# Altium PCB fpga_board.PcbDoc (part 1 of 4)
Units mil, origin at the board's own origin, x right, y up, seen from the top; angles counter-clockwise.
Board outline 3204.72 x 2960.63 mil, 6 copper layers (Top Layer, GND1, SIG, PWR, GND2, Bottom Layer), stack 32.112 mil thick; 192 components, 182 nets, 714 pads, 321 vias.
Unrouted connection lines stored in the file: 11.
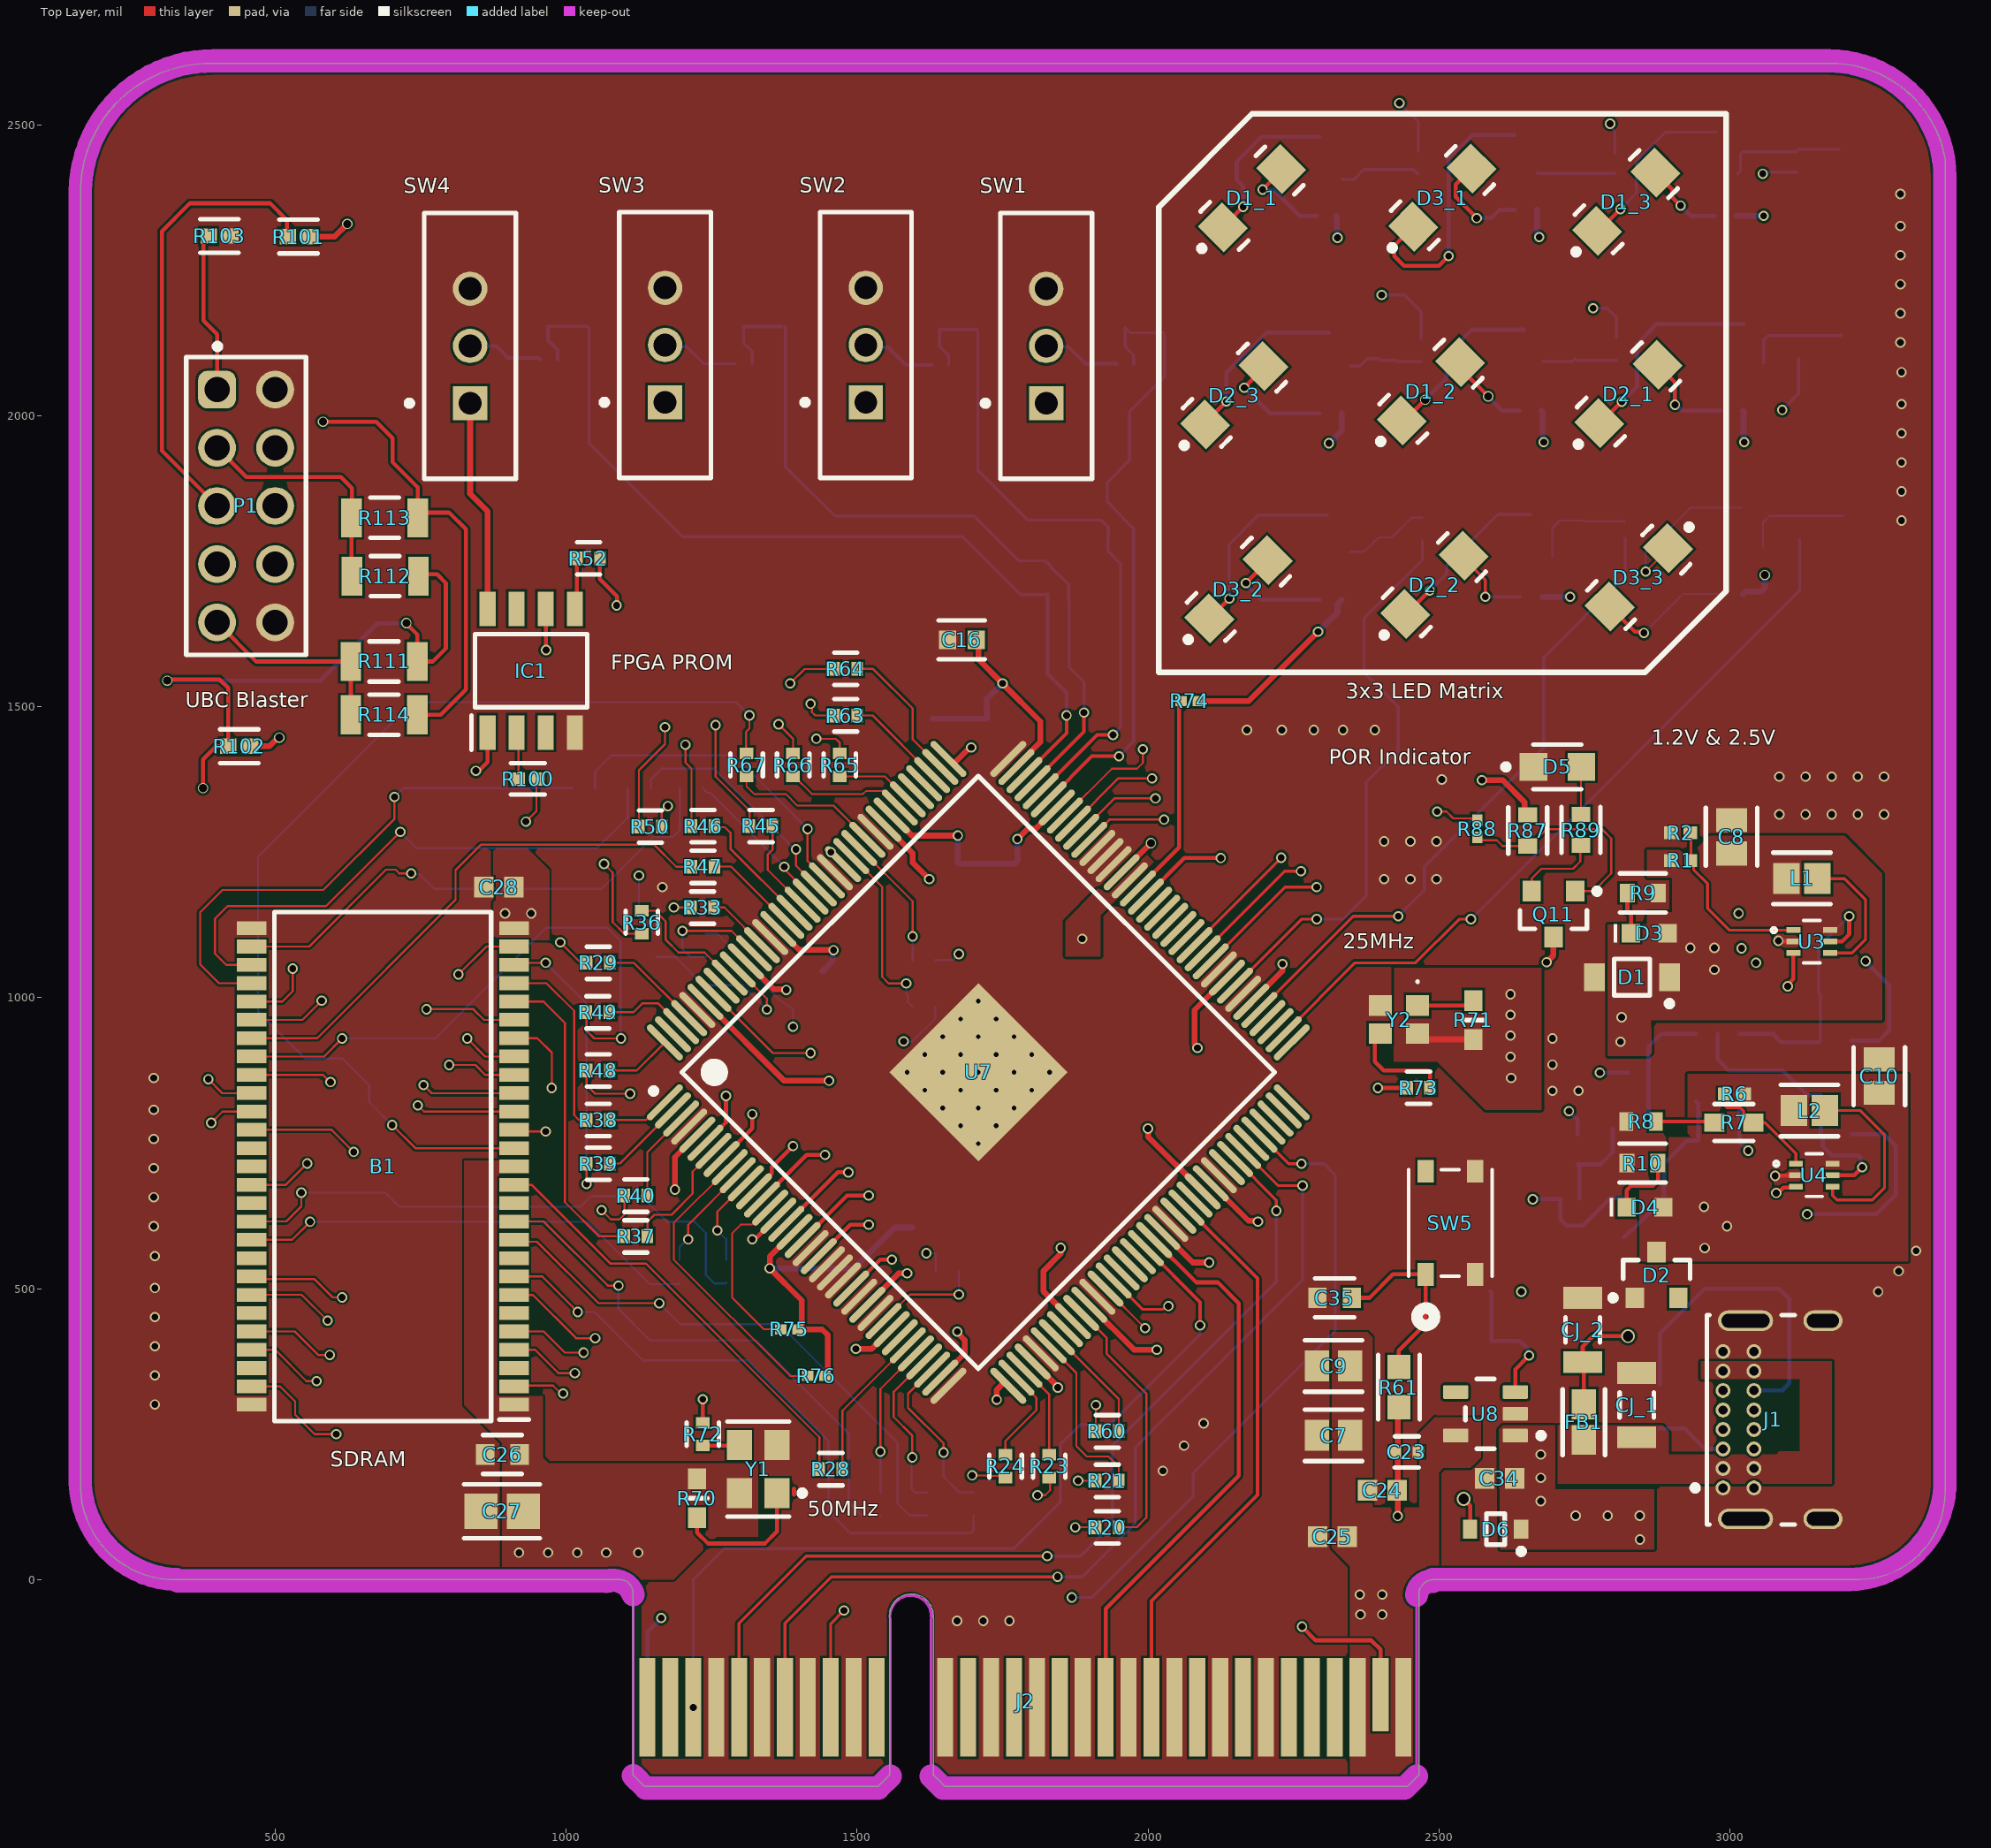
[diagram p0: Top Layer view]
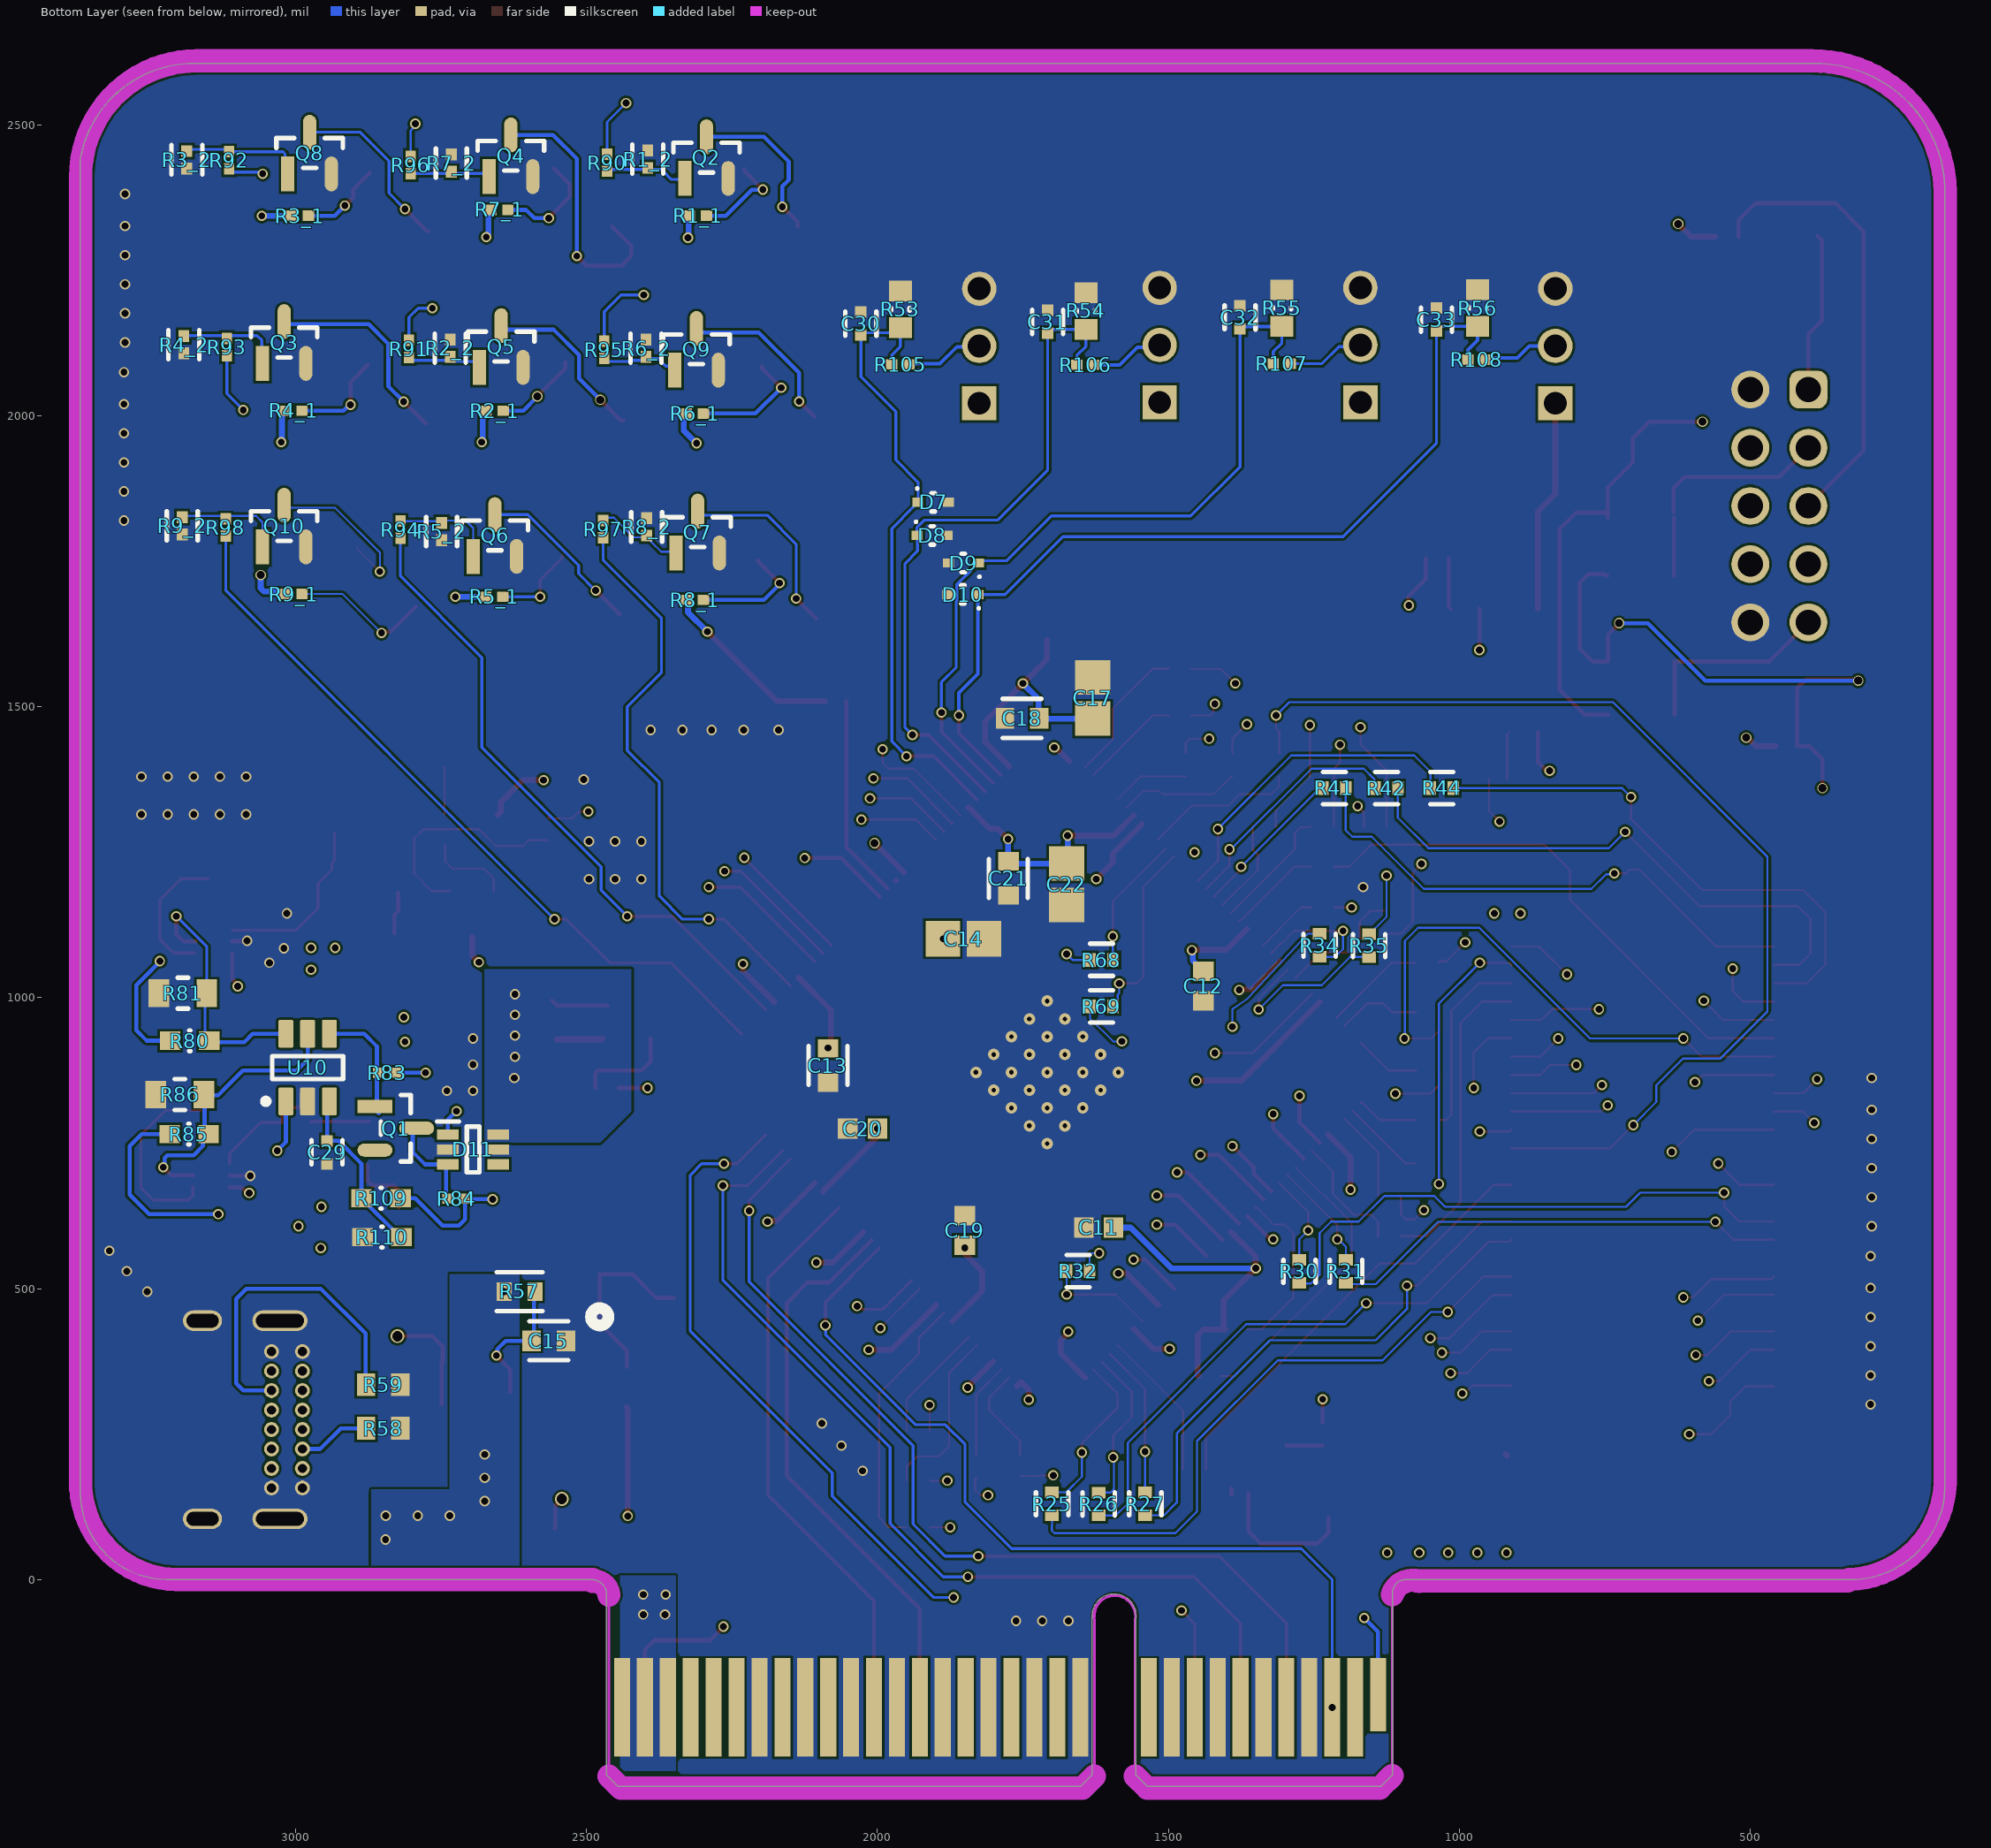
[diagram p1: Bottom Layer view, seen from below]
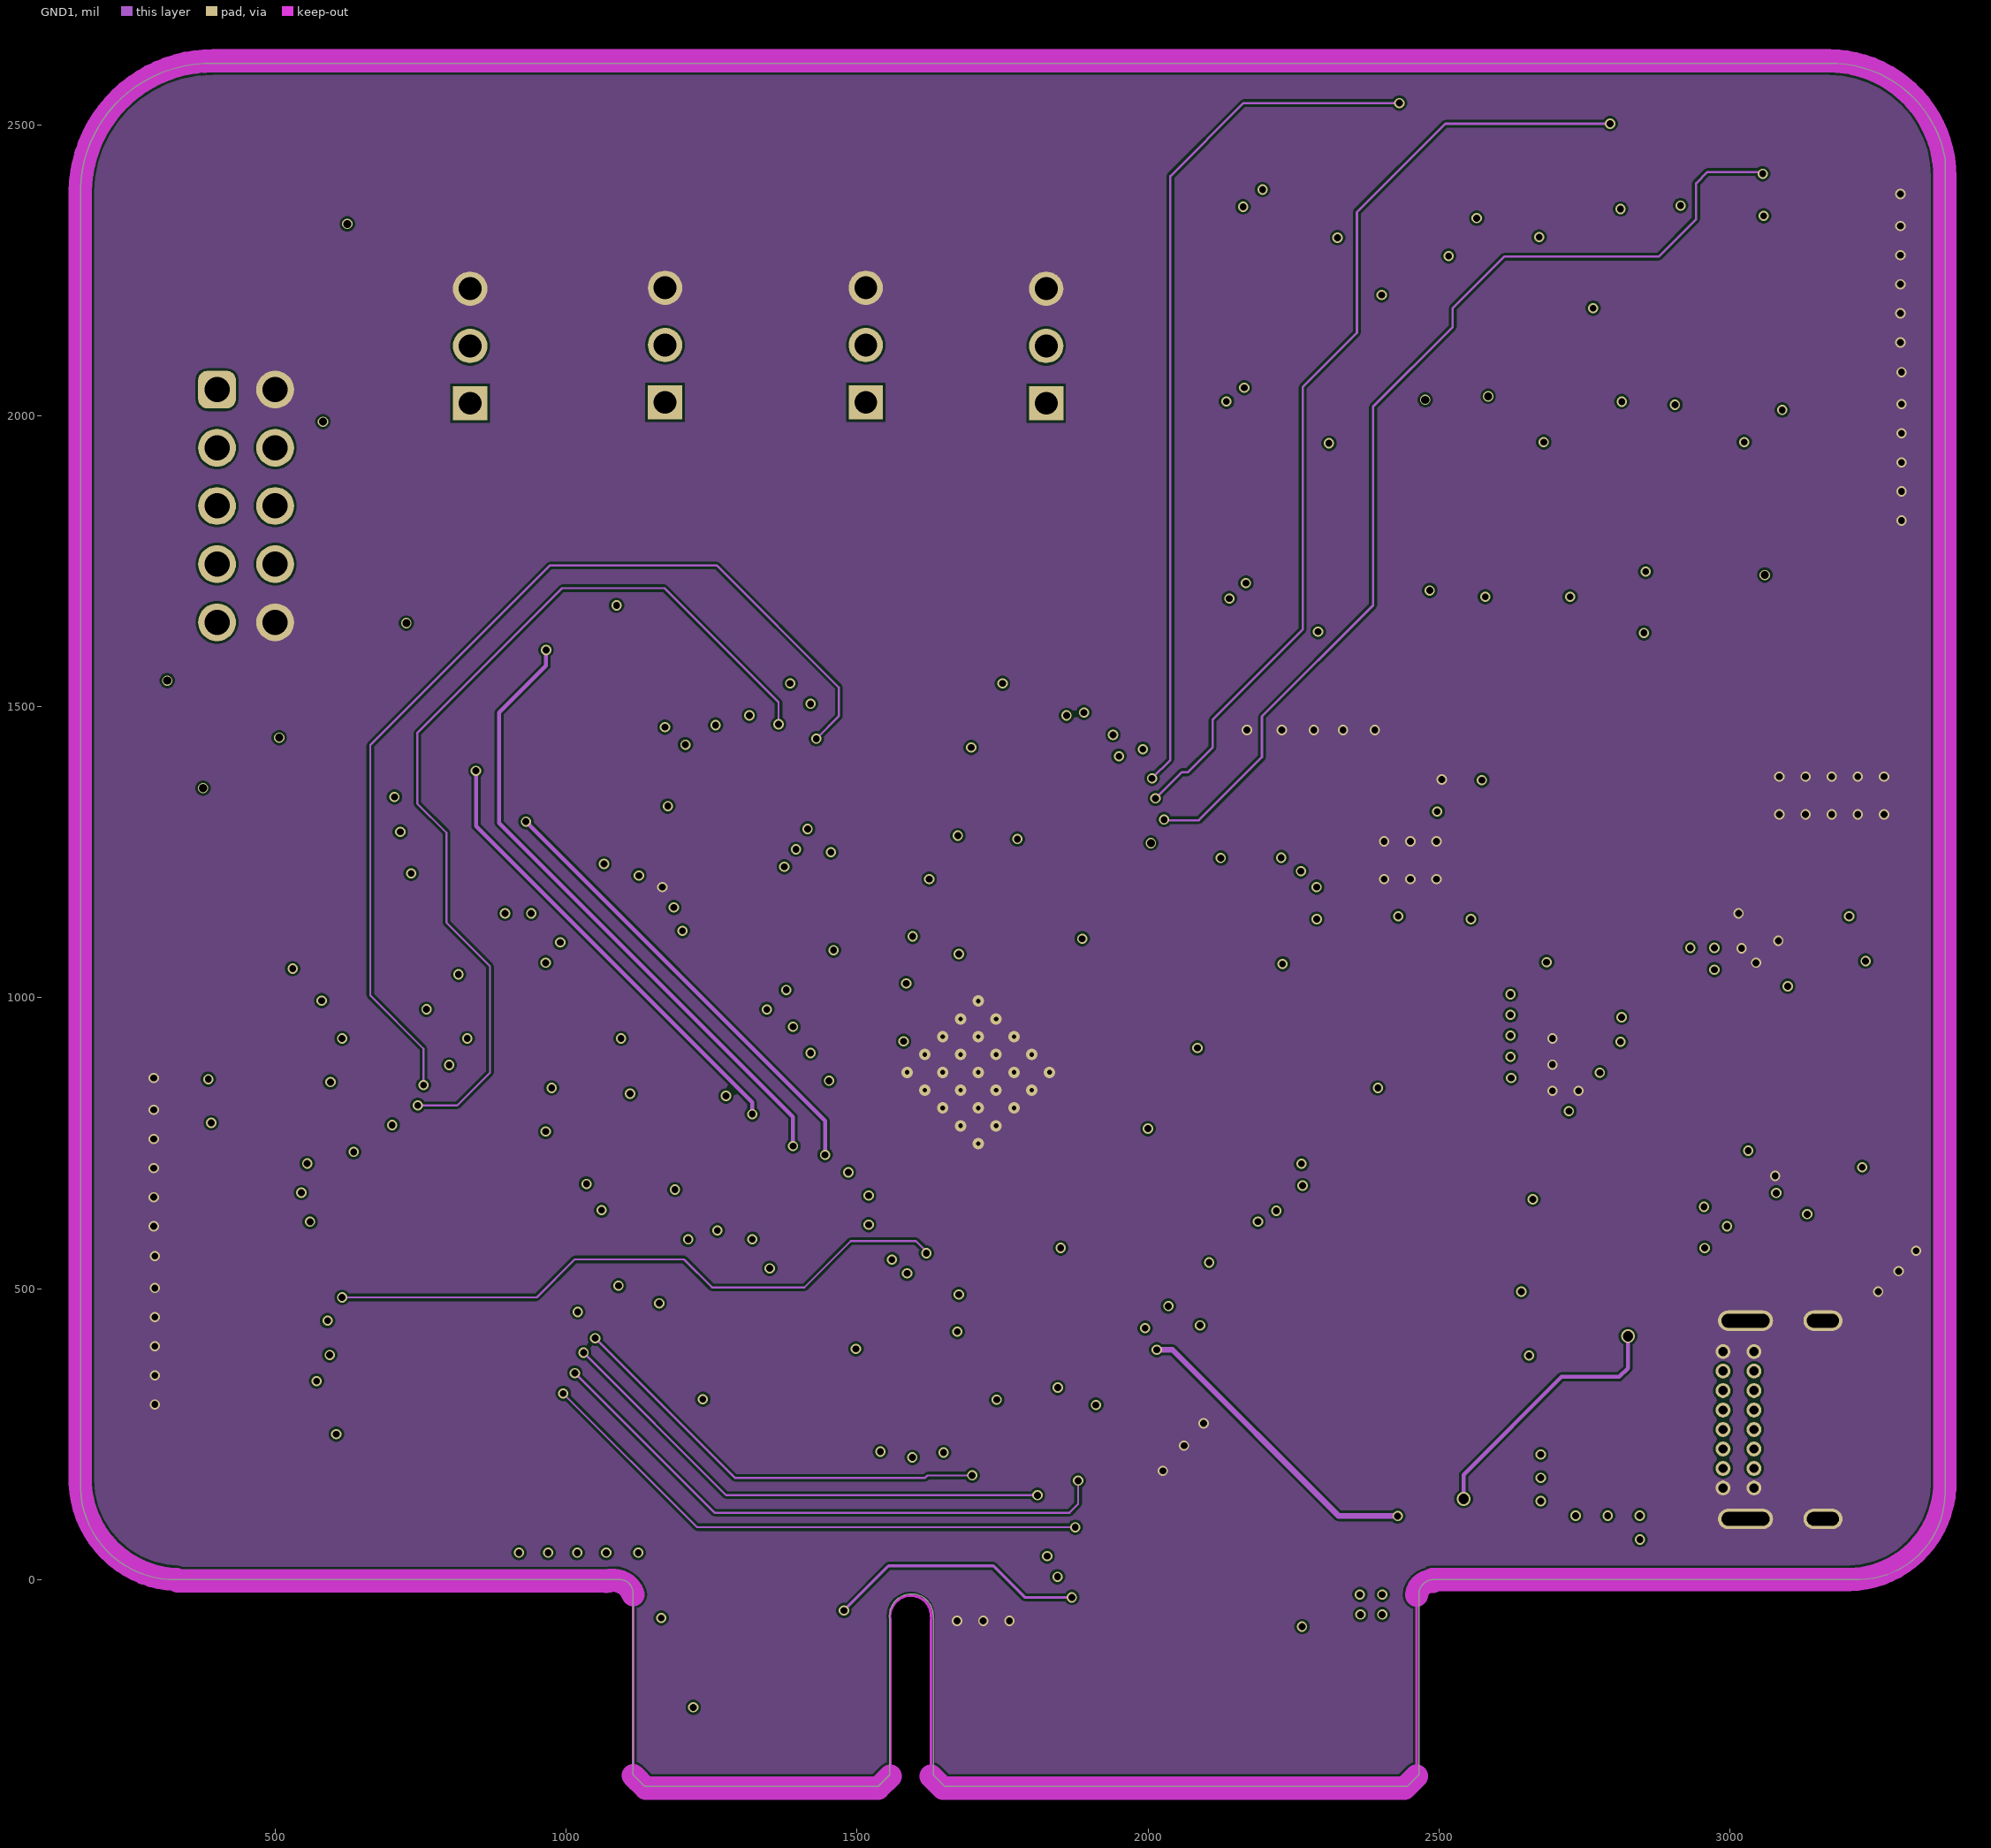
[diagram p2: GND1]
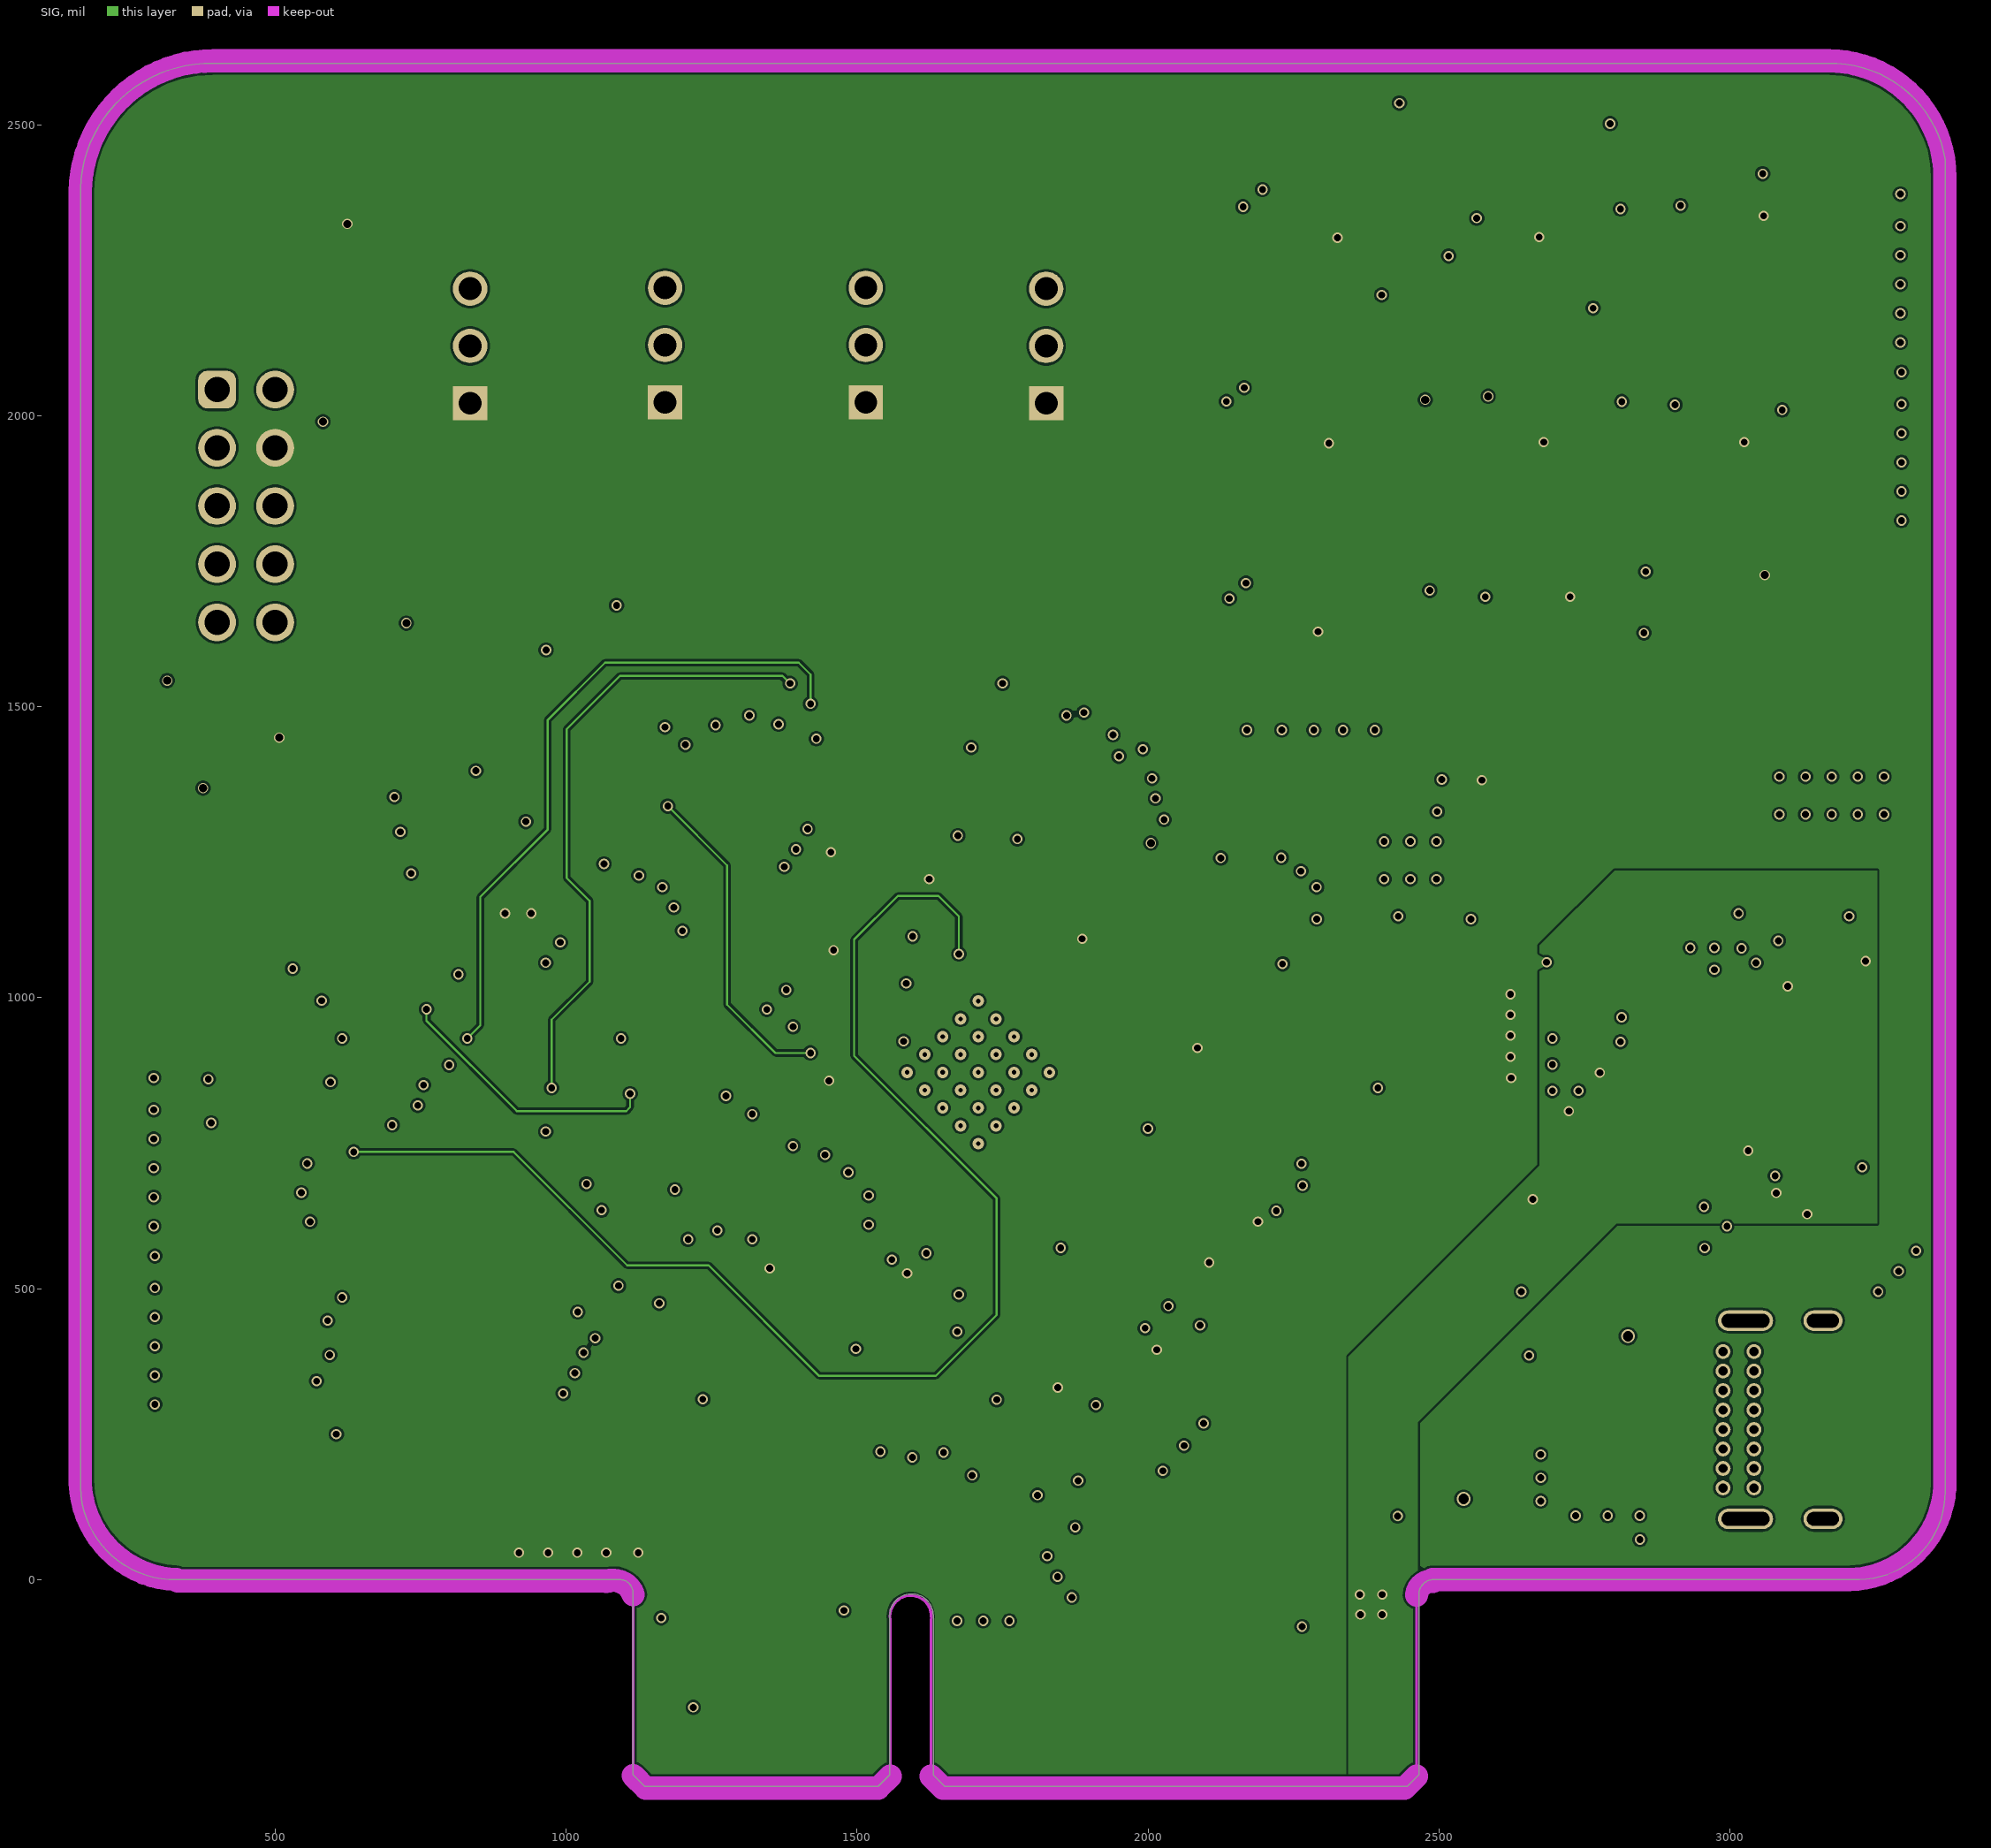
[diagram p3: SIG]
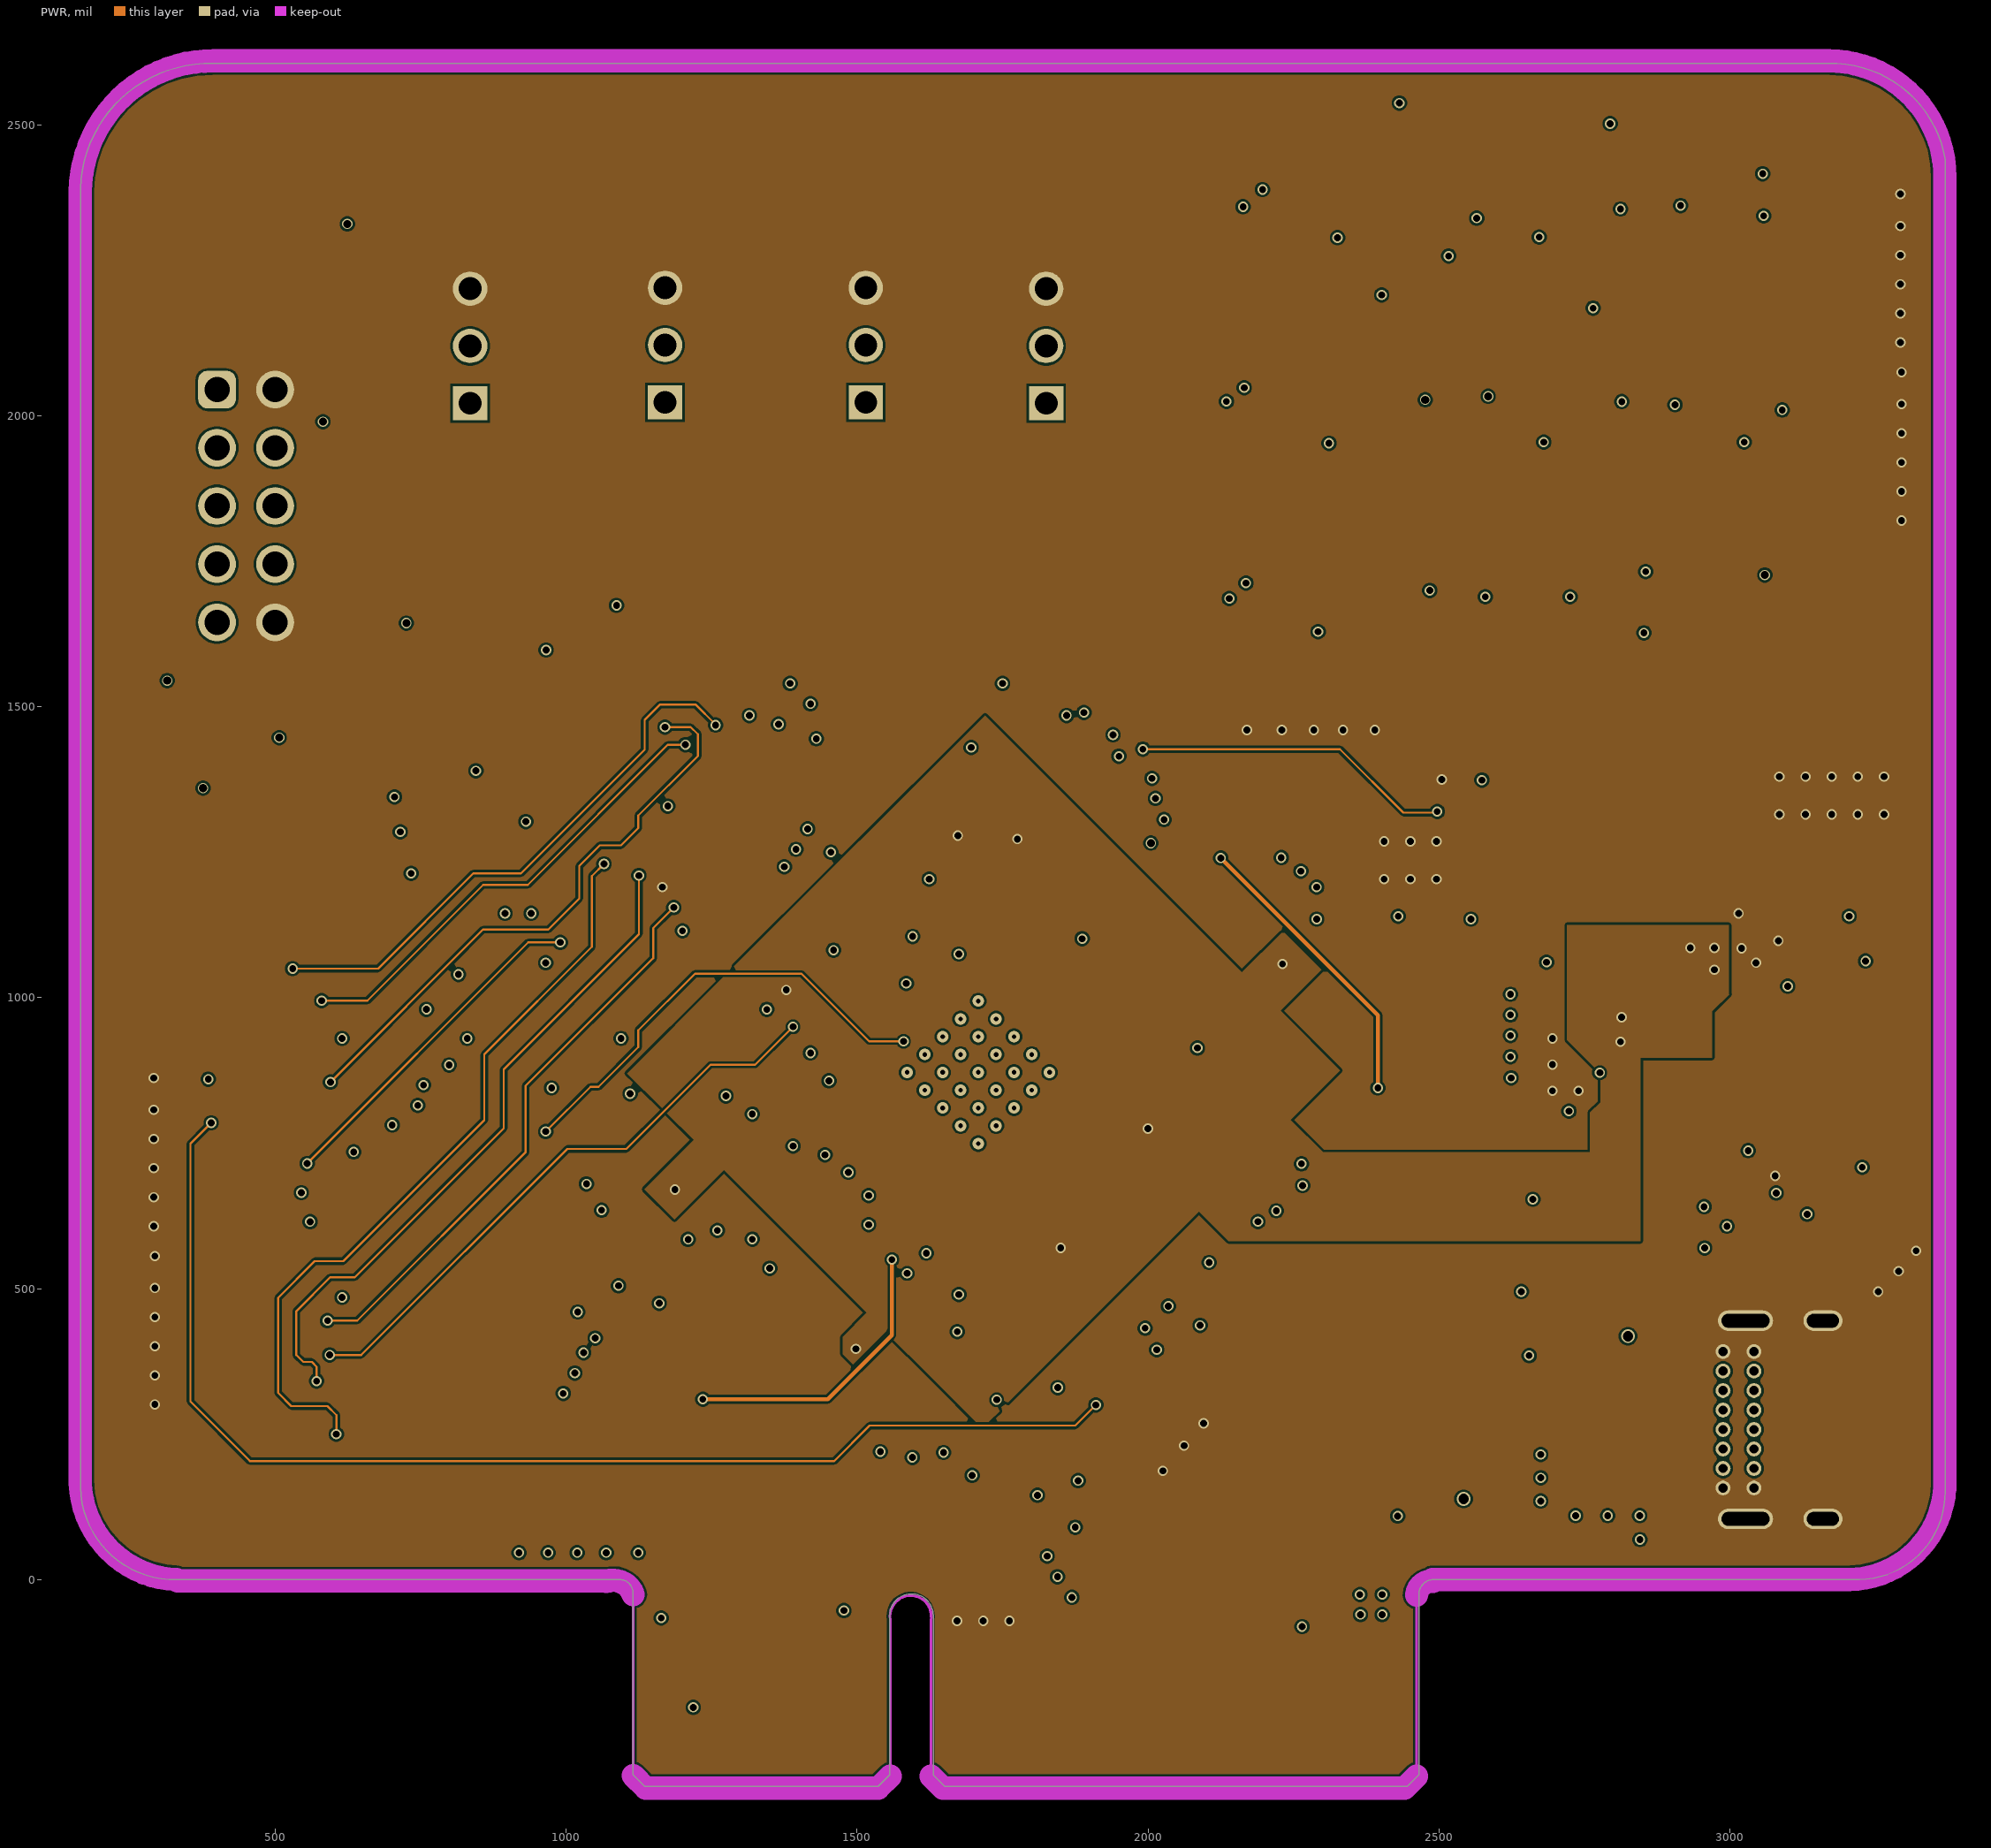
[diagram p4: PWR]
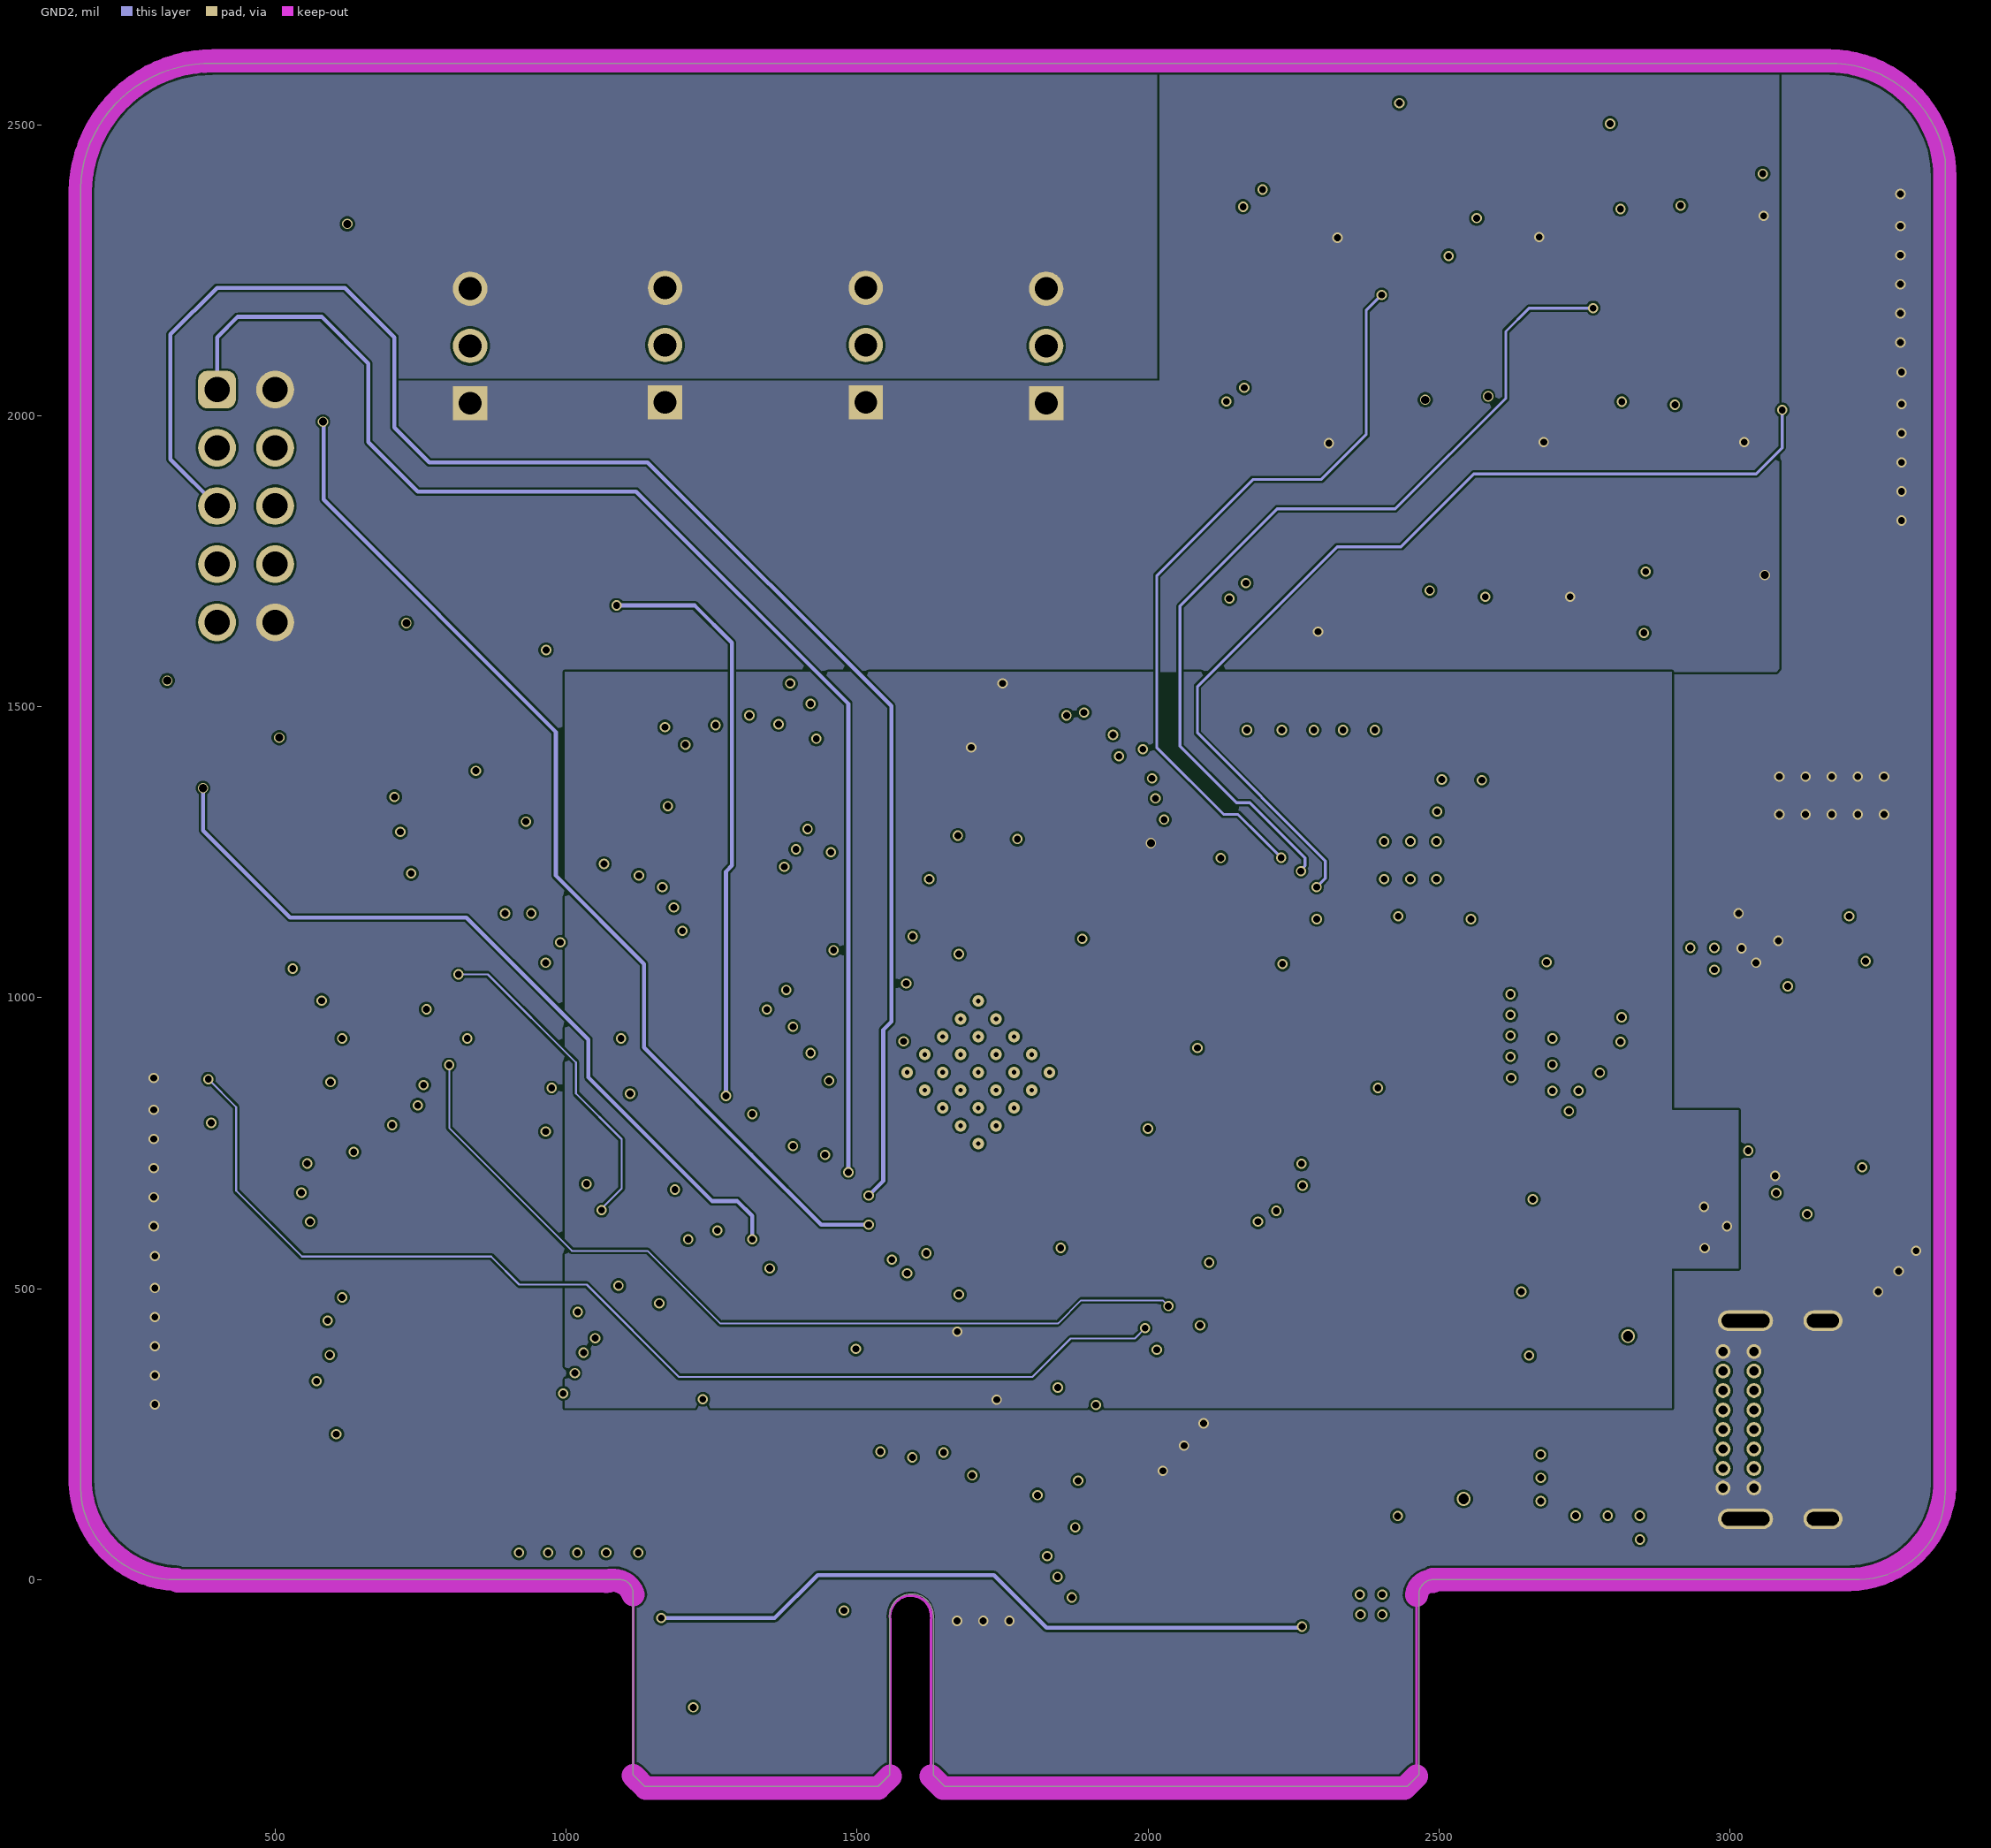
[diagram p5: GND2]
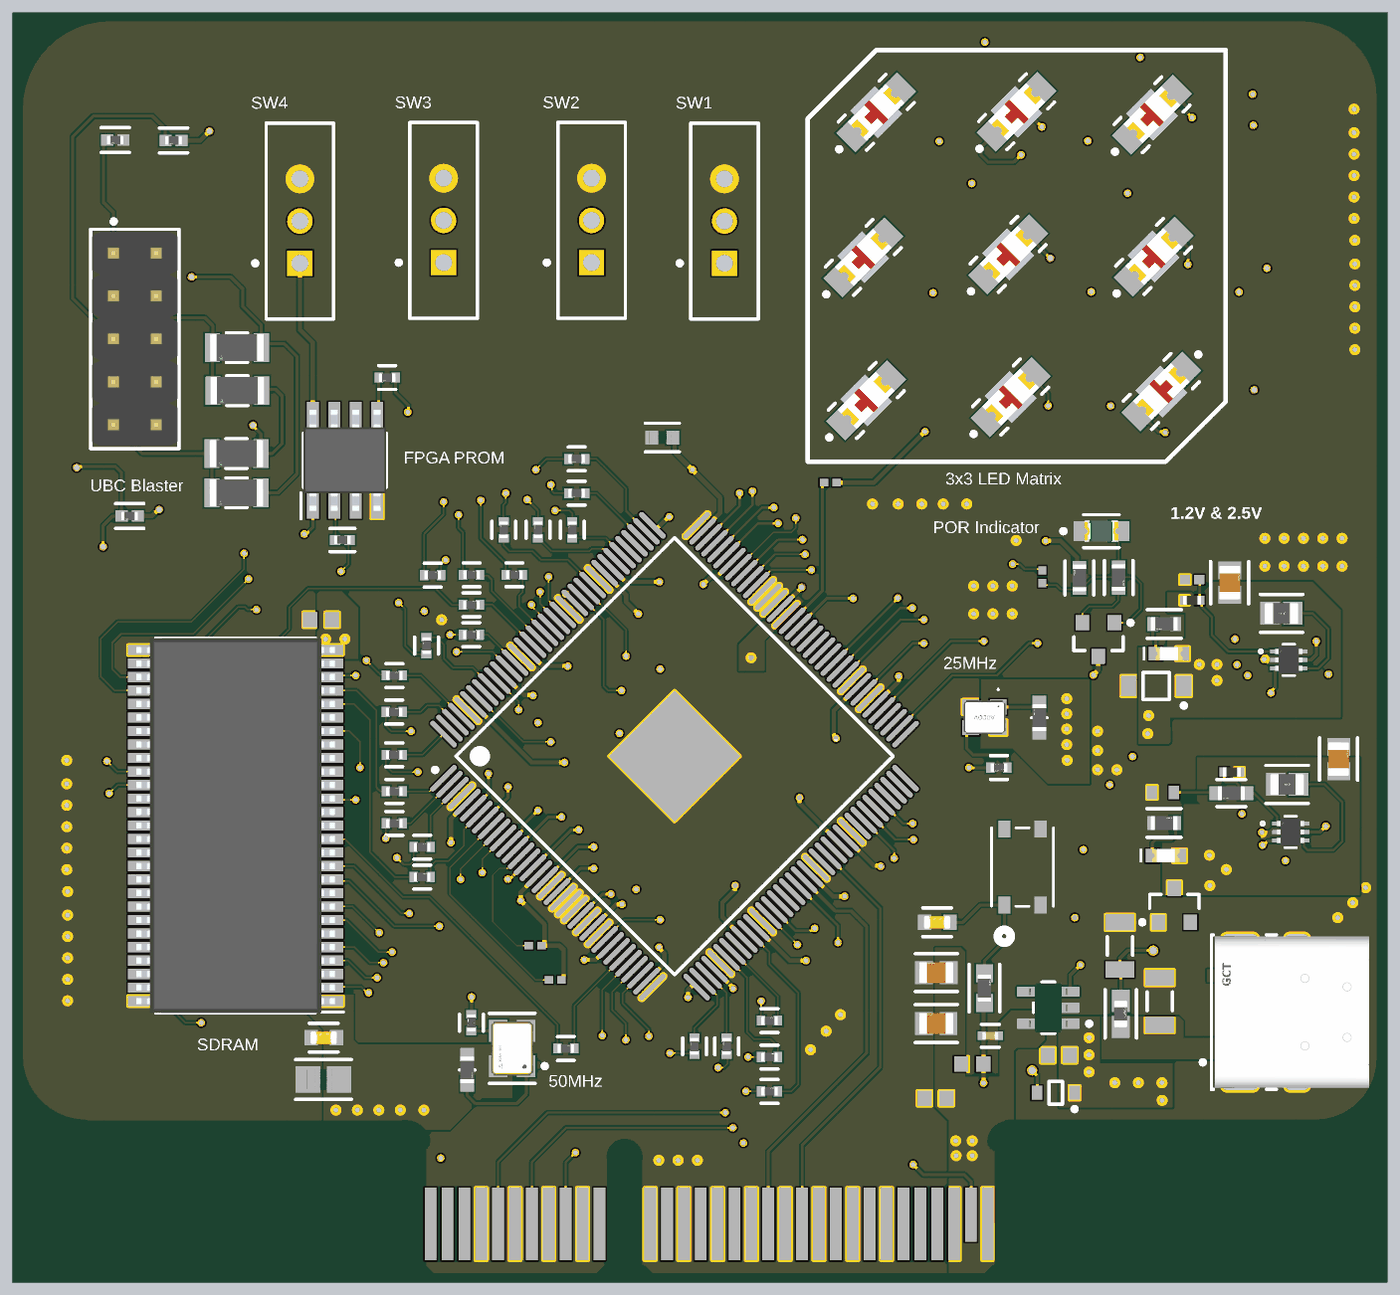
[diagram p8: 3D render of the assembled board from above, using the file's embedded part models]
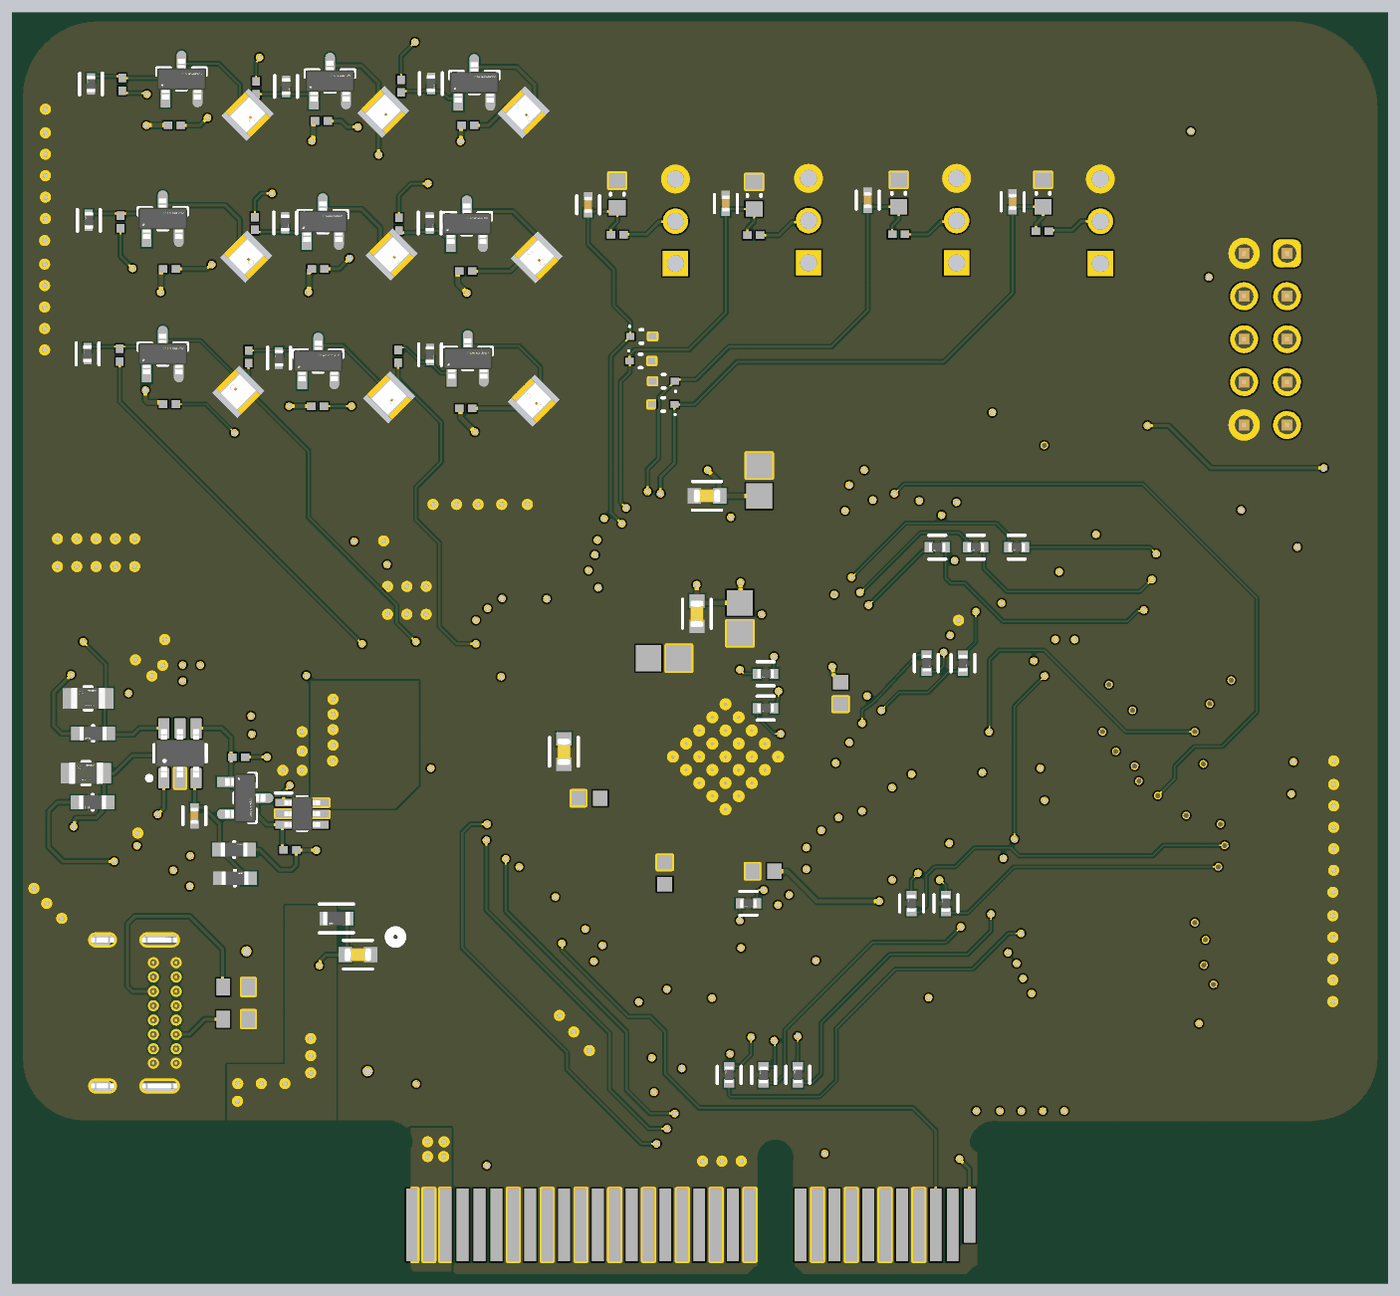
[diagram p9: 3D render of the assembled board from below, using the file's embedded part models]

## Layer stack, top to bottom
Top Solder: solder mask 0.4, Solder Resist, Dk 3.5
Top Layer: signal copper 1.4
Dielectric 2: prepreg 2.8, PP-006, Dk 4.1
GND1: signal copper 1.378
Dielectric 3: prepreg 2.8, PP-006, Dk 4.1
SIG: signal copper 1.378
Dielectric 1: dielectric 12.6, FR-4, Dk 4.8
PWR: signal copper 1.378
Dielectric 4: prepreg 2.8, PP-006, Dk 4.1
GND2: signal copper 1.378
Dielectric 5: prepreg 2.8, PP-006, Dk 4.1
Bottom Layer: signal copper 1.4
Bottom Solder: solder mask 0.4, Solder Resist, Dk 3.5

## Board outline
1115.16,-335.52 1115.16,-20.67 ccw(c1091.54,-23.62) 1088.58,0 1088.58,0.02 330.67,0.04 cw(c327.23,161.87) 165.39,158.43 165.35,158.46 165.35,2390.75 cw(c386.81,2383.86) 393.7,2605.32 3169.29,2605.32 cw(c3175.27,2407.99) 3370.08,2439.96 3369.93,151.47 cw(c3220.41,149.7) 3222.18,0.17 2490.33,0.17 ccw(c2491.31,-25.59) 2465.55,-26.57 2465.55,-335.63 2445.87,-355.32 1650.59,-355.32 1630.91,-335.63 1630.91,-61.02 ccw(c1593.5,-61.97) 1556.1,-62.99 1556.1,-335.63 1536.42,-355.32 1134.96,-355.32

## Design rules (kind name [scope] priority, off if disabled: settings)
Clearance [All] p1: gap=4 ignorepadtopadclearanceinfootprint=TRUE
MinimumSolderMaskSliver [All] p1: minsoldermaskwidth=1
PolygonConnect [All] p1: connectstyle=Direct reliefconductorwidth=10 reliefentries=4 polygonreliefangle="90 Angle" airgapwidth=10
RoutingVias [All] p1: holewidth=28 width=50 viastyle="Through Hole" minholewidth=28 minwidth=50 maxholewidth=28 maxwidth=50
SilkToSolderMaskClearance [IsPad] p1: minsilkscreentomaskgap=1 clearancetoexposedcopper=TRUE
SolderMaskExpansion [All] p1: expansion=4 istentingtop=FALSE
SupplyNets "Schematic Supply Nets_4" [InNet('3v3')] p1: voltage=0.000
SupplyNets "Schematic Supply Nets_3" [InNet('2.5V')] p2: voltage=0.000
SupplyNets "Schematic Supply Nets_1" [InNet('1.2V')] p3: voltage=0.000
SupplyNets "Schematic Supply Nets_2" [InNet('VCC')] p4: voltage=0.000
SupplyNets "Schematic Supply Nets" [InNet('GND')] p5: voltage=0.000
Width Width_2 [(InNet('CLK Input') OR InNet('CLK Input Term') OR InNet('CLK_Enable') OR InNet('Column Address Strobe') OR InNet('Column Address Strobe Term') OR InNet('Higher Byte Mask') OR InNet('Higher Byte Mask Term') OR InNet('Lower Byte Mask') OR InNet('Lower Byte Mask Term') OR InNet('Row Address Strobe') OR InNet('Row Address Strobe Term') OR InNet('Write Enable') OR InNet('Write Enable Term'))] p1: maxlimit=3.5 minlimit=3 preferedwidth=3.5 minimp=50.000000 maximp=50.000000 favimp=50.000000
Width Width_dram_address [(InNet('Addr Bit 0') OR InNet('Addr Bit 1') OR InNet('Addr Bit 1 Term') OR InNet('Addr Bit 2') OR InNet('Addr Bit 2 Term') OR InNet('Addr Bit 3') OR InNet('Addr Bit 3 Term') OR InNet('Addr Bit 4 Term') OR InNet('Addr Bit 5 Term') OR InNet('Addr Bit 6 Term') OR InNet('Addr Bit 7 Term') OR InNet('Addr Bit 8 Term') OR InNet('Addr Bit 9') OR InNet('Addr Bit 9 Term') OR InNet('Addr Bit 10') OR InNet('Addr Bit 10 Term') OR InNet('Addr Bit 11') OR InNet('Addr Bit 11 Term') OR InNet('Addr Bit 12') OR InNet('Addr Bit 12 Term') OR InNet('Address Bit 4') OR InNet('Address Bit 5') OR InNet('Address Bit 6') OR InNet('Address Bit 7') OR InNet('Address Bit 8') OR InNet('Bank Select 0') OR InNet('Bank Select 0 Term') OR InNet('Bank Select 1') OR InNet('Bank Select 1 Term') OR InNet('Addr BIt 0 Term'))] p2: maxlimit=3.5 minlimit=3 preferedwidth=3.5 minimp=50.000000 maximp=50.000000 favimp=50.000000
Width width_dram [InNet('Data Bit 15 Term') OR InNet('Data Bit 15') OR InNet('Data Bit 14 Term') OR InNet('Data Bit 14') OR InNet('Data Bit 13 Term') OR InNet('Data Bit 13') OR InNet('Data Bit 12 Term') OR InNet('Data Bit 12') OR InNet('Data Bit 0') OR InNet('Data Bit 1')  OR InNet('Data Bit 2') OR InNet('Data Bit 3') OR InNet('Data Bit 4') OR InNet('Data Bit 5') OR InNet('Data Bit 6') OR InNet('Data Bit 7') OR InNet('Data Bit 8') OR InNet('Data Bit 9') OR InNet('Data Bit 10') OR InNet('Data Bit 11') OR InNet('Data Bit 0 Term') OR InNet('Data Bit 1 Term') OR InNet('Data Bit 2 Term') OR InNet('Data Bit 3 Term') OR InNet('Data Bit 4 Term') OR InNet('Data Bit 5 Term') OR InNet('Data Bit 6 Term')  OR InNet('Data Bit 7 Term') OR InNet('Data Bit 8 Term') OR  InNet('Data Bit 9 Term') OR InNet('Data Bit 10 Term') OR InNet('Data Bit 11 Term') OR InNet('Data Bit 12 Term') OR InNet('Data Bit 13 Term') OR InNet('Data Bit 14 Term') OR InNet('Data Bit 15 Term')] p3: maxlimit=3.5 minlimit=3 preferedwidth=3.5 minimp=50.000000 maximp=50.000000 favimp=50.000000
Width width_io [InNet('SW_IN1') OR InNet('SW_IN2') OR InNet('SW_IN3') OR InNet('SW_IN4') OR InNet('IO1') OR InNet('IO2') OR InNet('IO3') OR InNet('IO4') OR InNet('IO5') OR InNet('IO6') OR InNet('IO7') OR InNet('IO8') OR InNet('IO9') OR InNet('CS_3') OR InNet('IO1_RES') OR InNet('IO2_RES') OR InNet('IO3_RES') OR InNet('IO4_RES') OR InNet('IO5_RES') OR InNet('IO6_RES') OR InNet('IO7_RES') OR InNet('IO8_RES') OR InNet('IO9_RES')] p4: maxlimit=7 minlimit=3 preferedwidth=5 minimp=50.000000 maximp=50.000000 favimp=50.000000
Width Width_1 [(InNet('1.2V') OR InNet('2.5V') OR InNet('GND') OR InNet('VCC'))] p5: maxlimit=10 minlimit=7 preferedwidth=10 minimp=50.000000 maximp=50.000000 favimp=50.000000
Width [All] p6: maxlimit=7 minlimit=3 preferedwidth=5
28 further rules are at their usual default settings.

## Classes and differential pairs
component class Power: C7 C8 C9 C10 C29 D1 D2 D3 D4 D11 L1 L2 Q1 R1 R2 R6 R7 R8 R9 R10 R80 R81 R83 R84 R85 R86 R109 R110 U3 U4 U10
component class FPGA2: D5 Q11 R20 R21 R23 R24 R25 R26 R27 R28 R30 R31 R32 R37 R38 R39 R40 R52 R60 R87 R88 R89 U7
component class Memory: B1 C23 C24 C26 C27 C28 DRAM FLASH_MEM_1 IC1 R100
component class "USB Connector": C15 C25 C34 C35 CJ_1 CJ_2 D6 FB1 J1 R57 R58 R59 R61 SW5 U8
component class IOs: C30 C31 C32 C33 D1_1 D1_2 D1_3 D2_1 D2_2 D2_3 D3_1 D3_2 D3_3 D7 D8 D9 D10 Q2 Q3 Q4 Q5 Q6 Q7 Q8 Q9 Q10 R1_1 R1_2 R2_1 R2_2 R3_1 R3_2 R4_1 R4_2 R5_1 R5_2 R6_1 R6_2 R7_1 R7_2 R8_1 R8_2 R9_1 R9_2 R53 R54 R55 R56 R90 R91 R92 R93 R94 R95 R96 R97 R98 R105 R106 R107 R108 SW1 SW2 SW3 SW4
component class Connectors: J2 P1 R101 R102 R103 R111 R112 R113 R114
component class FPGA3: C11 C12 C13 C14 C16 C17 C18 C19 C20 C21 C22 R29 R33 R34 R35 R36 R41 R42 R44 R45 R46 R47 R48 R49 R50 R63 R64 R65 R66 R67 R68 R69
component class FPGA1: R70 R71 R72 R73 R74 R75 R76 Y1 Y2

## Components (designator, comment, footprint, x,y, rotation, side; value= is the part's Value field where it differs from the comment)
B1 "IS42S16160J-7TLI" SOP80P1176X120-54N 685,710 r180 top locked
C7 "GRT21BR61E226ME13L" FP-GRT21B-0_2-IPC_C 2318.87,248.03 r180 top
C8 "GRT21BR61E226ME13L" FP-GRT21B-0_2-IPC_C 3002.95,1276.57 r90 top
C9 "GRT21BR61E226ME13L" FP-GRT21B-0_2-IPC_C 2318.9,367.13 r180 top
C10 "GRT21BR61E226ME13L" FP-GRT21B-0_2-IPC_C 3256.89,865.13 r90 top
C11 "C0603C105K9PACTU" CAPC1608X90X35LL15T15 1620,605 r180 bottom
C12 "C0603C105K9PACTU" CAPC1608X90X35LL15T15 1440,1020 r90 bottom
C13 "CC0603KRX7R9BB104" FP-CC0603-DA-MFG 2085,883.56 r270 bottom value="100 nF"
C14 "C0805S472K5RACTU" CAPC2013X145X50ML20T25 1852.36,1101.38 r0 bottom
C15 "CC0603KRX5R8BB105" FP-CC0603-DA-MFG 2564.96,410.43 r180 bottom value="1 uF"
C16 "CL10B102KB8NNNC" FP-CL10-IPC_C 1680,1615 r180 top
C17 "C0805S472K5RACTU" CAPC2013X145X50ML20T25 1630,1515 r270 bottom
C18 "CC0603KRX7R9BB104" FP-CC0603-DA-MFG 1751.44,1480 r0 bottom value="100 nF"
C19 "C0603C105K9PACTU" CAPC1608X90X35LL15T15 1850,600 r270 bottom
C20 "C0603C105K9PACTU" CAPC1608X90X35LL15T15 2025.59,775 r180 bottom
C21 "CC0603KRX7R9BB104" FP-CC0603-DA-MFG 1775,1205 r270 bottom value="100 nF"
C22 "C0805S472K5RACTU" CAPC2013X145X50ML20T25 1675,1195 r90 bottom
C23 "CC0402KRX7R7BB104" FP-CC0402-MFG 2444.88,219.49 r0 top value="100 nF"
C24 "C0603C105K9PACTU" CAPC1608X90X35LL15T15 2402.56,153.54 r0 top
C25 "C0603C105K9PACTU" CAPC1608X90X35LL15T15 2316.93,73.82 r0 top
C26 "CC0603KRX7R9BB104" FP-CC0603-DA-MFG 890.47,215 r180 top value="100 nF"
C27 "CL21A475KAQNNNE" FP-CL21-IPC_A 890,117.5 r180 top
C28 "C0603C105K9PACTU" CAPC1608X90X35LL15T15 884.41,1190 r0 top
C29 "CC0402KRX7R7BB104" FP-CC0402-MFG 2945.87,734.25 r270 bottom value="100 nF"
C30 "CC0402KRX7R9BB103" FP-CC0402-MFG 2028.54,2158.46 r90 bottom value="10 nF"
C31 "CC0402KRX7R9BB103" FP-CC0402-MFG 1707.68,2161.42 r90 bottom value="10 nF"
C32 "CC0402KRX7R9BB103" FP-CC0402-MFG 1376.97,2169.29 r90 bottom value="10 nF"
C33 "CC0402KRX7R9BB103" FP-CC0402-MFG 1039.37,2165.35 r90 bottom value="10 nF"
C34 "C0603C105K9PACTU" CAPC1608X90X35LL15T15 2604.33,174.21 r0 top
C35 "CC0603KRX7R9BB104" FP-CC0603-DA-MFG 2320.85,484.25 r180 top value="100 nF"
CJ_1 "100nF" CAPC1206(3216)170_L 2840,300 r270 top
CJ_2 "100nF" CAPC1206(3216)170_L 2747.05,429.13 r270 top
D1 "SZMMSZ4678T1G" ONSC-SOD-123-2-425-04_V 2831.69,1035.43 r180 top
D1_1 "LTST-C230KRKT" FP-LTST-C230KRKT-MFG 2178.75,2373.86 r45 top
D1_2 "LTST-C230KRKT" FP-LTST-C230KRKT-MFG 2486.22,2042.32 r45 top
D1_3 "LTST-C230KRKT" FP-LTST-C230KRKT-MFG 2821.85,2368.11 r45 top
D2 "MMBZ5223BLT1G" ONSC-SOT-23-3-318-08_V 2874.02,523.62 r90 top
D2_1 "LTST-C230KRKT" FP-LTST-C230KRKT-MFG 2825.79,2037.4 r45 top
D2_2 "LTST-C230KRKT" FP-LTST-C230KRKT-MFG 2492.13,1709.65 r45 top
D2_3 "LTST-C230KRKT" FP-LTST-C230KRKT-MFG 2148.62,2035.43 r45 top
D3 "150060VS75000" WL-SMCW_0603_150060xx75000 2861.48,1110.82 r0 top
D3_1 "LTST-C230KRKT" FP-LTST-C230KRKT-MFG 2505.91,2375 r45 top
D3_2 "LTST-C230KRKT" FP-LTST-C230KRKT-MFG 2155.51,1701.77 r45 top
D3_3 "LTST-C230KRKT" FP-LTST-C230KRKT-MFG 2843.5,1722.44 r225 top
D4 "150060VS75000" WL-SMCW_0603_150060xx75000 2854.33,639.76 r0 top
D5 "APHCM2012CGCK-F01" FP-APHCM2012CGCK-F01-MFG 2703.74,1396.65 r0 top
D6 "NSR0320MW2T1G" ONSC-SOD-323-2-477-02_V 2597.44,86.61 r180 top
D7 "MM5Z3V3T1G" ONSC-SOD-523-2-502-01_V 1904.13,1851.38 r180 bottom
D8 "MM5Z3V3T1G" ONSC-SOD-523-2-502-01_V 1906.1,1794.29 r180 bottom
D9 "MM5Z3V3T1G" ONSC-SOD-523-2-502-01_V 1852.36,1747.05 r0 bottom
D10 "MM5Z3V3T1G" ONSC-SOD-523-2-502-01_V 1853.35,1692.91 r0 bottom
D11 "LM66100DCKR" SOP65P210X110-6N 2694.88,739.17 r180 bottom
FB1 "BLM18KG601SN1D" FP-BLM18-0_15-t0_8-IPC_A 2749.02,270.67 r90 top
IC1 "EPCQ16ASI8N" SOIC127P600X175-8N 939.96,1562.01 r90 top
J1 "USB4085-GF-A" FP-USB4085-GF-A-MFG 3146.81,274.72 r90 top
J2 "PCIe-X4" BUS_PCIEXPRESS_X4 1139.76,-219.49 r0 top
L1 "MLP2012H2R2MT0S1" FP-MLP2012M-IPC_C 3123.86,1205 r180 top
L2 "MLP2012H2R2MT0S1" FP-MLP2012M-IPC_C 3136.81,806.1 r180 top
P1 "61301021121" 61301021121 450,1845.08 r270 top
Q1 "MMBF170LT1G" FP-318-08-IPC_B 2827.76,775.59 r180 bottom
Q2 "MMBF170LT1G" FP-318-08-IPC_B 2293.83,2443.64 r90 bottom
Q3 "MMBF170LT1G" FP-318-08-IPC_B 3019.68,2125.98 r90 bottom
Q4 "MMBF170LT1G" FP-318-08-IPC_B 2629.92,2446.85 r90 bottom
Q5 "MMBF170LT1G" FP-318-08-IPC_B 2646.65,2119.09 r90 bottom
Q6 "MMBF170LT1G" FP-318-08-IPC_B 2657.48,1794.28 r90 bottom
Q7 "MMBF170LT1G" FP-318-08-IPC_B 2309.06,1800.2 r90 bottom
Q8 "MMBF170LT1G" FP-318-08-IPC_B 2975.92,2451.51 r90 bottom
Q9 "MMBF170LT1G" FP-318-08-IPC_B 2311.02,2114.17 r90 bottom
Q10 "MMBF170LT1G" FP-318-08-IPC_B 3019.68,1810.43 r90 bottom
Q11 "MMBT3906LT1G" ONSC-SOT-23-3-318-08_V 2696.85,1143.7 r270 top
R1 "ERJ-2RKF2003X" RESC1005X40X25NL05T05 2915.52,1235.49 r0 top
R1_1 "RC0402FR-07330RL" RESC1005X40X25LL05T10 2308.75,2343.86 r180 bottom
R1_2 "RC0402JR-0710KL" FP-RC0402-0_4-IPC_C 2394.68,2440.94 r270 bottom
R2 "RC0402FR-07100KL" RESC1005X40X25NL05T10 2915.35,1283.46 r180 top
R2_1 "RC0402FR-07330RL" RESC1005X40X25LL05T10 2657.59,2008.86 r180 bottom
R2_2 "RC0402JR-0710KL" FP-RC0402-0_4-IPC_C 2734.25,2116.14 r270 bottom
R3_1 "RC0402FR-07330RL" RESC1005X40X25LL05T10 2992.59,2343.86 r180 bottom
R3_2 "RC0402JR-0710KL" FP-RC0402-0_4-IPC_C 3187.01,2439.96 r90 bottom
R4_1 "RC0402FR-07330RL" RESC1005X40X25LL05T10 3003.75,2008.86 r180 bottom
R4_2 "RC0402JR-0710KL" FP-RC0402-0_4-IPC_C 3191.93,2122.05 r90 bottom
R5_1 "RC0402FR-07330RL" RESC1005X40X25LL05T10 2658.75,1688.86 r180 bottom
R5_2 "RC0402JR-0710KL" FP-RC0402-0_4-IPC_C 2749.02,1801.04 r90 bottom
R6 "ERJ-2RKF2003X" RESC1005X40X25NL05T05 3007.87,834.65 r180 top
R6_1 "RC0402FR-07330RL" RESC1005X40X25LL05T10 2313.75,2003.86 r180 bottom
R6_2 "RC0402JR-0710KL" FP-RC0402-0_4-IPC_C 2397.64,2116 r270 bottom
R7 "RT0603BRD0750KL" FP-RT0603-0_55-MFG 3006.89,785.43 r180 top
R7_1 "RC0402FR-07330RL" RESC1005X40X25LL05T10 2649.91,2353.86 r180 bottom
R7_2 "RC0402JR-0710KL" FP-RC0402-0_4-IPC_C 2732.28,2434.2 r270 bottom
R8 "RC0603FR-0713KL" RESC1608X55X25LL10T15 2847.44,787.4 r180 top
R8_1 "RC0402FR-07330RL" RESC1005X40X25LL05T10 2313.75,1683.86 r180 bottom
R8_2 "RC0402JR-0710KL" FP-RC0402-0_4-IPC_C 2396.65,1809.06 r270 bottom
R9 "RC0603FR-0710KL" FP-RC0603-0_55-IPC_C 2850.46,1180.12 r180 top
R9_1 "RC0402FR-07330RL" RESC1005X40X25LL05T10 3003.75,1693.86 r180 bottom
R9_2 "RC0402JR-0710KL" FP-RC0402-0_4-IPC_C 3194.88,1811.02 r90 bottom
R10 "RC0603FR-0710KL" FP-RC0603-0_55-IPC_C 2849.88,715.83 r0 top
R20 "RT0402BRE0750RL" FP-RT0402-0_35-MFG 1930,90 r0 top
R21 "RT0402BRE0750RL" FP-RT0402-0_35-MFG 1930,170 r0 top
R23 "RT0402BRE0750RL" FP-RT0402-0_35-MFG 1830,195 r90 top
R24 "RT0402BRE0750RL" FP-RT0402-0_35-MFG 1755,195 r90 top
R25 "RT0402BRE0750RL" FP-RT0402-0_35-MFG 1700,130.32 r90 bottom
R26 "RT0402BRE0750RL" FP-RT0402-0_35-MFG 1620,130 r90 bottom
R27 "RT0402BRE0750RL" FP-RT0402-0_35-MFG 1540,130.32 r90 bottom
R28 "RT0402BRE0750RL" FP-RT0402-0_35-MFG 1455,190 r0 top
R29 "RT0402BRE0750RL" FP-RT0402-0_35-MFG 1055.31,1060 r0 top
R30 "RT0402BRE0750RL" FP-RT0402-0_35-MFG 1275,530 r90 bottom
R31 "RT0402BRE0750RL" FP-RT0402-0_35-MFG 1195,530 r90 bottom
R32 "RT0402BRE0750RL" FP-RT0402-0_35-MFG 1655,530 r0 bottom
R33 "RT0402BRE0750RL" FP-RT0402-0_35-MFG 1234.68,1155 r0 top
R34 "RT0402BRE0750RL" FP-RT0402-0_35-MFG 1240,1090 r270 bottom
R35 "RT0402BRE0750RL" FP-RT0402-0_35-MFG 1155,1089.68 r270 bottom
R36 "RT0402BRE0750RL" FP-RT0402-0_35-MFG 1130,1129.68 r90 top
R37 "RT0402BRE0750RL" FP-RT0402-0_35-MFG 1120,590 r0 top
R38 "RT0402BRE0750RL" FP-RT0402-0_35-MFG 1055.31,790 r0 top
R39 "RT0402BRE0750RL" FP-RT0402-0_35-MFG 1055.31,715 r0 top
R40 "RT0402BRE0750RL" FP-RT0402-0_35-MFG 1120,660 r0 top
R41 "RT0402BRE0750RL" FP-RT0402-0_35-MFG 1215,1360 r0 bottom
R42 "RT0402BRE0750RL" FP-RT0402-0_35-MFG 1125.31,1360 r0 bottom
R44 "RT0402BRE0750RL" FP-RT0402-0_35-MFG 1030,1360 r0 bottom
R45 "RT0402BRE0750RL" FP-RT0402-0_35-MFG 1335,1295 r0 top
R46 "RT0402BRE0750RL" FP-RT0402-0_35-MFG 1235.31,1295 r0 top
R47 "RT0402BRE0750RL" FP-RT0402-0_35-MFG 1235,1225 r0 top
R48 "RT0402BRE0750RL" FP-RT0402-0_35-MFG 1055,875 r0 top
R49 "RT0402BRE0750RL" FP-RT0402-0_35-MFG 1054.68,975 r0 top
R50 "RT0402BRE0750RL" FP-RT0402-0_35-MFG 1144.68,1294.29 r0 top
R52 "RT0402BRE0750RL" FP-RT0402-0_35-MFG 1038.39,1754.92 r180 top
R53 "3K3 5% 0603(1608)" RESC0603(1608)_N 1960.63,2183.07 r270 bottom value="3300.00 Ohm"
R54 "3K3 5% 0603(1608)" RESC0603(1608)_N 1641.73,2180.12 r270 bottom value="3300.00 Ohm"
R55 "3K3 5% 0603(1608)" RESC0603(1608)_N 1305,2185 r270 bottom value="3300.00 Ohm"
R56 "3K3 5% 0603(1608)" RESC0603(1608)_N 968.5,2185.04 r270 bottom value="3300.00 Ohm"
R57 "RC0603FR-0710KL" FP-RC0603-0_55-IPC_C 2615,495 r0 bottom
R58 "RC0603FR-075K1L" RESC1608X55X25ML10T15 2849.53,260 r180 bottom
R59 "RC0603FR-075K1L" RESC1608X55X25ML10T15 2849.53,335 r180 bottom
R60 "RT0402BRE0750RL" FP-RT0402-0_35-MFG 1930,255 r0 top
R61 "AC0603JR-0747KL" FP-AC0603-IPC_A 2431.1,330.71 r90 top
R63 "RT0402BRE0750RL" FP-RT0402-0_35-MFG 1480.31,1485 r180 top
R64 "RT0402BRE0750RL" FP-RT0402-0_35-MFG 1480.31,1565 r180 top
R65 "RT0402BRE0750RL" FP-RT0402-0_35-MFG 1470,1400 r90 top
R66 "RT0402BRE0750RL" FP-RT0402-0_35-MFG 1390,1400 r90 top
R67 "RT0402BRE0750RL" FP-RT0402-0_35-MFG 1310,1400 r90 top
R68 "RT0402BRE0750RL" FP-RT0402-0_35-MFG 1615,1065 r0 bottom
R69 "RT0402BRE0750RL" FP-RT0402-0_35-MFG 1615,985 r0 bottom
R70 "RC0603FR-073K3L" FP-RC0603-0_55-MFG 1225,140 r270 top
R71 "RC0603FR-073K3L" FP-RC0603-0_55-MFG 2559.06,961.61 r90 top
R72 "RT0402BRE0733RL" FP-RT0402-MFG 1234.57,250 r90 top value=33Ω
R73 "RT0402BRE0733RL" FP-RT0402-MFG 2465,845 r180 top value=33Ω
R74 "RC0402FR-0710KL" RESC1005X40X25LL05T10 2071.67,1510 r180 top
R75 "RC0402FR-0710KL" RESC1005X40X25LL05T10 1383.33,430 r180 top
R76 "RC0402FR-0710KL" RESC1005X40X25LL05T10 1430,350 r180 top
R80 "RC0603FR-07100KL" FP-RC0603-0_55-MFG 3182.09,926.18 r0 bottom
R81 "RT0805BRD07200KL" FP-RT0805-MFG 3193.9,1007.87 r180 bottom value=200KΩ
R83 "RC0402FR-0710KL" RESC1005X40X25LL05T10 2842.52,871.06 r180 bottom
R84 "RC0402FR-0710KL" RESC1005X40X25LL05T10 2723.43,654.53 r0 bottom
R85 "RC0603FR-07100KL" FP-RC0603-0_55-MFG 3183.07,765.75 r0 bottom
R86 "RT0805BRD07200KL" FP-RT0805-MFG 3198.82,833.66 r180 bottom value=200KΩ
R87 "RC0603FR-0710KL" FP-RC0603-0_55-IPC_C 2652.56,1287.4 r90 top
R88 "RC0402FR-07330RL" RESC1005X40X25LL05T10 2565.94,1290.35 r90 top
R89 "RC0603FR-0710KL" FP-RC0603-0_55-IPC_C 2744.09,1288.39 r270 top
R90 "RC0402FR-07330RL" RESC1005X40X25LL05T10 2464.57,2435.04 r90 bottom
R91 "RC0402FR-07330RL" RESC1005X40X25LL05T10 2805.12,2115.02 r90 bottom
R92 "RC0402FR-07330RL" RESC1005X40X25LL05T10 3114.17,2438.98 r270 bottom
R93 "RC0402FR-07330RL" RESC1005X40X25LL05T10 3118.11,2118.11 r270 bottom
R94 "RC0402FR-07330RL" RESC1005X40X25LL05T10 2819.88,1804.13 r270 bottom
R95 "RC0402FR-07330RL" RESC1005X40X25LL05T10 2469.49,2113.19 r90 bottom
R96 "RC0402FR-07330RL" RESC1005X40X25LL05T10 2802.17,2430.96 r90 bottom
R97 "RC0402FR-07330RL" RESC1005X40X25LL05T10 2471.46,1805.12 r270 bottom
R98 "RC0402FR-07330RL" RESC1005X40X25LL05T10 3120.08,1808.07 r270 bottom
R100 "RC0402JR-0722RL" FP-RC0402-0_4-IPC_B 934.06,1375.98 r180 top
R101 "RC0402FR-071KL" FP-RC0402-0_4-IPC_A 540.35,2308.07 r180 top
R102 "RC0402FR-071KL" FP-RC0402-0_4-IPC_A 437.99,1432.09 r180 top
R103 "RC0402FR-071KL" FP-RC0402-0_4-IPC_A 404.39,2309.06 r180 top
R105 "RC0402FR-07330RL" RESC1005X40X25LL05T10 1960.63,2088.58 r0 bottom
R106 "RC0402FR-07330RL" RESC1005X40X25LL05T10 1642.72,2087.6 r0 bottom
R107 "RC0402FR-07330RL" RESC1005X40X25LL05T10 1305.12,2089.57 r0 bottom
R108 "RC0402FR-07330RL" RESC1005X40X25LL05T10 970.47,2096.46 r0 bottom
R109 "RC0603FR-07100KL" FP-RC0603-0_55-MFG 2853.35,655.51 r180 bottom
R110 "RC0603FR-07100KL" FP-RC0603-0_55-MFG 2851.38,588.58 r180 bottom
R111 "CRCW12060000ZSTA" FP-CRCW1206-MFG 687.01,1577.76 r180 top
R112 "CRCW12060000ZSTA" FP-CRCW1206-MFG 688.98,1724.41 r180 top
R113 "CRCW12060000ZSTA" FP-CRCW1206-MFG 687.99,1824.8 r180 top
R114 "CRCW12060000ZSTA" FP-CRCW1206-MFG 687.01,1486.22 r180 top
SW1 "EG1218" ESWI-EG1218_V 1825,2120 r90 top
SW2 "EG1218" ESWI-EG1218_V 1515,2121.57 r90 top
SW3 "EG1218" ESWI-EG1218_V 1170,2121.57 r90 top
SW4 "EG1218" ESWI-EG1218_V 835,2120 r90 top
SW5 "PTS815 SJM 250 SMTR LFS" "SW4_PTS815 SJM 250 SMTR LFS_CNK" 2519.68,613.19 r90 top
U3 "AP61300Z6-7" AP61300Z6-7_DIO 3140.75,1096.46 r0 top
U4 "AP61300Z6-7" AP61300Z6-7_DIO 3145,695 r0 top
U7 "EP4CE6E22C8N" EQFP144_A-165_D2-54_M 1708.41,871.78 r45 top locked
U8 "TLV73333PDBVR" FP-DBV0005A-MFG 2580,285 r180 top
U10 "LM3880MF-1AB/NOPB" DBV0006A_M 2979.33,879.92 r90 bottom
Y1 "ASE-50.000MHZ-LC-T" FP-ASE-MFG 1330,190 r90 top
Y2 "ASDDV-25.000MHZ-LC-T" AbraconASDDV 2431.34,962.52 r180 top

## Footprints (in the part's own frame and the unit in brackets; to place one, negate y for a bottom-side part, rotate by r counter-clockwise, add the part's x,y. Pads: shape width x height; smd on the part's side, far side on the other; paste and mask are expansions set on the pad)
61301021121 [mm] "Pin Header, pitch 2.54 mm, THT, Vertical, dual row, 10p"
  rrect50% 1.65x1.65 hole 1.1: 1(-5.08,-1.27)
  round 1.65 hole 1.1: 2(-5.08,1.27) 3(-2.54,-1.27) 4(-2.54,1.27) 5(0,-1.27) 6(0,1.27) 7(2.54,-1.27) 8(2.54,1.27) 9(5.08,-1.27) 10(5.08,1.27)
  silkscreen extent -7.08,-2.62 6.5,2.62, body extent -6.35,-2.54 6.35,2.54, height 8.59
AbraconASDDV [mm]
  rect 1x0.9 smd: 1(-0.813,-0.612) 2(0.813,-0.612) 3(0.813,0.612) 4(-0.813,0.612)
  silkscreen extent -0.86,-1.7 -0.76,-1.6, body extent -1.25,-1 1.25,1, height 0.95
AP61300Z6-7_DIO [mil]
  rect 24x10 smd paste+0 mask+0: 1(-31.5,19.68) 2(-31.5,0) 3(-31.5,-19.69) 4(31.5,-19.69) 5(31.5,0) 6(31.5,19.68)
  silkscreen extent -69,-36 14,36, body extent -31,-31 31,31, height 24
BUS_PCIEXPRESS_X4 [mm]
  rect 0.7x3.2 smd far side: A1(0,0.55)
  rect 0.7x4.3 smd far side: A2(1,0) A3(2,0) A4(3,0) A5(4,0) A6(5,0) A7(6,0) A8(7,0) A9(8,0) A10(9,0) A11(10,0) A12(13,0) A13(14,0) A14(15,0) A15(16,0) A16(17,0) A17(18,0) A18(19,0) A19(20,0) A20(21,0) A21(22,0) A22(23,0) A23(24,0) A24(25,0) A25(26,0) A26(27,0) A27(28,0) A28(29,0) A29(30,0) A30(31,0) A31(32,0) A32(33,0)
  rect 0.7x4.3 smd: B1(0,0) B2(1,0) B3(2,0) B4(3,0) B5(4,0) B6(5,0) B7(6,0) B8(7,0) B9(8,0) B10(9,0) B11(10,0) B12(13,0) B13(14,0) B14(15,0) B15(16,0) B16(17,0) B17(18,0) B18(19,0) B19(20,0) B20(21,0) B21(22,0) B22(23,0) B23(24,0) B24(25,0) B25(26,0) B26(27,0) B27(28,0) B28(29,0) B29(30,0) B30(31,0) B32(33,0)
  rect 0.7x3.2 smd: B31(32,0.55)
CAPC1206(3216)170_L [mm] "Chip Capacitor, Body 3.2x1.6mm, Height 1.7mm, IPC High Density"
  rect 0.95x1.7 smd: 1(-1.4,0) 2(1.4,0)
  silkscreen extent -0.55,-0.75 0.55,0.75, body extent -1.7,-0.9 1.7,0.9, height 1.7
CAPC1608X90X35LL15T15 [mm] "Chip Capacitor, 2-Leads, Body 1.60x0.81mm, IPC High Density"
  rect 0.85x0.9 smd: 1(-0.65,0) 2(0.65,0)
  body extent -0.88,-0.48 0.87,0.48, height 0.9
CAPC2013X145X50ML20T25 [mm] "Chip Capacitor, 2-Leads, Body 2.00x1.25mm, IPC Low Density"
  rect 1.5x1.55 smd: 1(-0.9,0) 2(0.9,0)
  body extent -1.1,-0.72 1.1,0.72, height 1.45
DBV0006A_M [mm] "SOT23, 6-Leads, Body 3.05x1.75mm, Pitch 0.95mm, IPC Low Density"
  rrect15% 1.2x0.65 smd: 1(-1.475,0.95) 2(-1.475,0) 3(-1.475,-0.95) 4(1.475,-0.95) 5(1.475,0) 6(1.475,0.95)
  silkscreen extent -1.6,-1.55 0.5,1.95, body extent -1.42,-1.46 1.42,1.46, height 1.11
EQFP144_A-165_D2-54_M [mm] "Shrink QFP, 144-Leads, Body 20x20mm, Pitch 0.5mm, Thermal Pad 5.55x5.55mm, IPC Low Density"
  oval 2.1x0.3 smd: 1(-10.6,8.75) 2(-10.6,8.25) 3(-10.6,7.75) 4(-10.6,7.25) 5(-10.6,6.75) 6(-10.6,6.25) 7(-10.6,5.75) 8(-10.6,5.25) 9(-10.6,4.75) 10(-10.6,4.25) 11(-10.6,3.75) 12(-10.6,3.25) 13(-10.6,2.75) 14(-10.6,2.25) 15(-10.6,1.75) 16(-10.6,1.25) 17(-10.6,0.75) 18(-10.6,0.25) 19(-10.6,-0.25) 20(-10.6,-0.75) 21(-10.6,-1.25) 22(-10.6,-1.75) 23(-10.6,-2.25) 24(-10.6,-2.75) 25(-10.6,-3.25) 26(-10.6,-3.75) 27(-10.6,-4.25) 28(-10.6,-4.75) 29(-10.6,-5.25) 30(-10.6,-5.75) 31(-10.6,-6.25) 32(-10.6,-6.75) 33(-10.6,-7.25) 34(-10.6,-7.75) 35(-10.6,-8.25) 36(-10.6,-8.75) 73(10.6,-8.75) 74(10.6,-8.25) 75(10.6,-7.75) 76(10.6,-7.25) 77(10.6,-6.75) 78(10.6,-6.25) 79(10.6,-5.75) 80(10.6,-5.25) 81(10.6,-4.75) 82(10.6,-4.25) 83(10.6,-3.75) 84(10.6,-3.25) 85(10.6,-2.75) 86(10.6,-2.25) 87(10.6,-1.75) 88(10.6,-1.25) 89(10.6,-0.75) 90(10.6,-0.25) 91(10.6,0.25) 92(10.6,0.75) 93(10.6,1.25) 94(10.6,1.75) 95(10.6,2.25) 96(10.6,2.75) 97(10.6,3.25) 98(10.6,3.75) 99(10.6,4.25) 100(10.6,4.75) 101(10.6,5.25) 102(10.6,5.75) 103(10.6,6.25) 104(10.6,6.75) 105(10.6,7.25) 106(10.6,7.75) 107(10.6,8.25) 108(10.6,8.75)
  oval 0.3x2.1 smd: 37(-8.75,-10.6) 38(-8.25,-10.6) 39(-7.75,-10.6) 40(-7.25,-10.6) 41(-6.75,-10.6) 42(-6.25,-10.6) 43(-5.75,-10.6) 44(-5.25,-10.6) 45(-4.75,-10.6) 46(-4.25,-10.6) 47(-3.75,-10.6) 48(-3.25,-10.6) 49(-2.75,-10.6) 50(-2.25,-10.6) 51(-1.75,-10.6) 52(-1.25,-10.6) 53(-0.75,-10.6) 54(-0.25,-10.6) 55(0.25,-10.6) 56(0.75,-10.6) 57(1.25,-10.6) 58(1.75,-10.6) 59(2.25,-10.6) 60(2.75,-10.6) 61(3.25,-10.6) 62(3.75,-10.6) 63(4.25,-10.6) 64(4.75,-10.6) 65(5.25,-10.6) 66(5.75,-10.6) 67(6.25,-10.6) 68(6.75,-10.6) 69(7.25,-10.6) 70(7.75,-10.6) 71(8.25,-10.6) 72(8.75,-10.6) 109(8.75,10.6) 110(8.25,10.6) 111(7.75,10.6) 112(7.25,10.6) 113(6.75,10.6) 114(6.25,10.6) 115(5.75,10.6) 116(5.25,10.6) 117(4.75,10.6) 118(4.25,10.6) 119(3.75,10.6) 120(3.25,10.6) 121(2.75,10.6) 122(2.25,10.6) 123(1.75,10.6) 124(1.25,10.6) 125(0.75,10.6) 126(0.25,10.6) 127(-0.25,10.6) 128(-0.75,10.6) 129(-1.25,10.6) 130(-1.75,10.6) 131(-2.25,10.6) 132(-2.75,10.6) 133(-3.25,10.6) 134(-3.75,10.6) 135(-4.25,10.6) 136(-4.75,10.6) 137(-5.25,10.6) 138(-5.75,10.6) 139(-6.25,10.6) 140(-6.75,10.6) 141(-7.25,10.6) 142(-7.75,10.6) 143(-8.25,10.6) 144(-8.75,10.6)
  rect 5.5x5.5 smd: 145(0,0)
  silkscreen extent -10.72,-9.15 9.15,9.57, body extent -10,-10 10,10, height 1.65
ESWI-EG1218_V [mm] "THD, 3-Leads, Body 11.6x4mm, Pitch 2.5mm"
  rect 1.5x1.5 hole 1: 1(-2.5,0)
  round 1.5 hole 1: 2(0,0) 3(2.5,0)
  silkscreen extent -5.8,-2 5.8,2.77, body extent -5.8,-2 5.8,2, height 7.4
FP-318-08-IPC_B [mm]
  rect 1.524x0.578 smd paste+0 mask+0: 1(-0.91,0.95)
  rrect100% 1.524x0.578 smd paste+0 mask+0: 2(-0.91,-0.95) 3(0.91,0)
  silkscreen extent -0.65,-1.45 0.65,1.45, body extent -1.2,-1.45 1.2,1.45, height 1.11
FP-AC0603-IPC_A [mil]
  rect 41.68x39.85 smd paste+0 mask+0: 1(-34.52,0) 2(34.52,0)
  silkscreen extent -55,-36 55,36, body extent -75,-40 75,40, height 10
FP-APHCM2012CGCK-F01-MFG [mm]
  rect 1.2x1.2 smd paste+0 mask+0: 1(-1.05,0) 2(1.05,0)
  silkscreen extent -2.37,-0.97 1.05,0.97, body extent -1.75,-0.77 1.75,0.77, height 0.25
FP-ASE-MFG [mm]
  rect 1.3x1.1 smd paste+0 mask+0: 1(-1.05,-0.825) 2(1.05,-0.825) 3(1.05,0.825) 4(-1.05,0.825)
  silkscreen extent -2.07,-2.05 2.07,1.35, body extent -1.8,-1.48 1.8,1.48, height 0.25
FP-BLM18-0_15-t0_8-IPC_A [mil]
  rect 51.42x41.66 smd paste+0 mask+0: 1(-30.55,0) 2(30.55,0)
  silkscreen extent -56,-37 56,37, body extent -76,-41 76,41, height 10
FP-CC0402-MFG [mm]
  rect 0.5x0.5 smd paste+0 mask+0: 1(-0.5,0) 2(0.5,0)
  silkscreen extent -0.53,-0.68 0.53,0.67, body extent -0.87,-0.48 0.87,0.48, height 0.25
FP-CC0603-DA-MFG [mm]
  rect 0.8x0.9 smd paste+0 mask+0: 1(-0.75,0) 2(0.75,0)
  silkscreen extent -0.85,-0.85 0.85,0.85, body extent -0.8,-0.4 0.8,0.4, height 0.9
FP-CL10-IPC_C [mil]
  rect 29.85x31.97 smd paste+0 mask+0: 1(-24.68,0) 2(24.68,0)
  silkscreen extent -40,-33 40,33, body extent -44,-22 44,22, height 10
FP-CL21-IPC_A [mil]
  rect 57.27x61.27 smd paste+0 mask+0: 1(-36.45,0) 2(36.45,0)
  silkscreen extent -65,-46 65,46, body extent -85,-50 85,50, height 10
FP-CRCW1206-MFG [mm]
  rect 0.9x1.7 smd paste+0 mask+0: 1(-1.45,0) 2(1.45,0)
  silkscreen extent -0.63,-0.87 0.63,0.87, body extent -2,-0.97 2,0.97, height 0.25
FP-DBV0005A-MFG [mm]
  rrect17% 1.1x0.6 smd paste+0 mask+0: 1(-1.3,0.95) 2(-1.3,0) 3(-1.3,-0.95) 4(1.3,-0.95) 5(1.3,0.95)
  silkscreen extent -2.55,-1.53 0.87,1.52, body extent -1.95,-1.78 1.95,1.78, height 0.25
FP-GRT21B-0_2-IPC_C [mil]
  rect 41.52x53.39 smd paste+0 mask+0: 1(-28.57,0) 2(28.57,0)
  silkscreen extent -49,-44 49,44, body extent -53,-32 53,32, height 10
FP-LTST-C230KRKT-MFG [mm]
  rect 1.5x1.6 smd paste+0 mask+0: 1(-1.8,0) 2(1.8,0)
  silkscreen extent -3.22,-1.19 1.99,1.19, body extent -2.65,-0.95 2.65,0.95, height 0.25
FP-MLP2012M-IPC_C [mil]
  rect 45.45x53.39 smd paste+0 mask+0: 1(-26.61,0) 2(26.61,0)
  silkscreen extent -49,-44 49,44, body extent -53,-32 53,32, height 10
FP-RC0402-0_4-IPC_A [mil]
  rect 28.16x26.48 smd paste+0 mask+0: 1(-18.84,0) 2(18.84,0)
  silkscreen extent -33,-29 33,29, body extent -41,-21 41,21, height 10
FP-RC0402-0_4-IPC_B [mil]
  rect 24.23x22.54 smd paste+0 mask+0: 1(-16.87,0) 2(16.87,0)
  silkscreen extent -29,-27 29,27, body extent -35,-17 35,17, height 10
FP-RC0402-0_4-IPC_C [mil]
  rect 20.29x18.6 smd paste+0 mask+0: 1(-14.9,0) 2(14.9,0)
  silkscreen extent -25,-27 25,27, body extent -20,-10 20,10, height 16
FP-RC0603-0_55-IPC_C [mil]
  rect 25.93x31.97 smd paste+0 mask+0: 1(-26.64,0) 2(26.64,0)
  silkscreen extent -40,-33 40,33, body extent -44,-22 44,22, height 10
FP-RC0603-0_55-MFG [mm]
  rect 0.9x0.8 smd paste+0 mask+0: 1(-0.85,0) 2(0.85,0)
  silkscreen extent 0,-0.45 0,0.45, body extent -1.4,-0.55 1.4,0.55, height 0.25
FP-RT0402-0_35-MFG [mm]
  rect 0.5x0.6 smd paste+0 mask+0: 1(-0.5,0) 2(0.5,0)
  silkscreen extent -0.5,-0.71 0.5,0.7, body extent -0.85,-0.4 0.85,0.4, height 0.25
FP-RT0402-MFG [mm]
  rect 0.5x0.6 smd paste+0 mask+0: 1(-0.5,0) 2(0.5,0)
  silkscreen extent -0.5,-0.71 0.5,0.7, body extent -0.5,-0.25 0.5,0.25, height 0.35
FP-RT0603-0_55-MFG [mm]
  rect 0.9x0.8 smd paste+0 mask+0: 1(-0.85,0) 2(0.85,0)
  silkscreen extent -0.85,-0.81 0.86,0.8, body extent -1.4,-0.55 1.4,0.55, height 0.25
FP-RT0805-MFG [mm]
  rect 0.9x1.2 smd paste+0 mask+0: 1(-1.05,0) 2(1.05,0)
  silkscreen extent -0.23,-0.67 0.23,0.67, body extent -1,-0.63 1,0.63, height 0.6
FP-USB4085-GF-A-MFG [mm]
  rrect100% 0.9x2.4 hole 2.1 slot 0.6 at 0 deg paste-2539.97 mask+0: 1(-4.325,3.045) 2(4.325,3.045)
  rrect100% 0.9x1.7 hole 1.4 slot 0.6 at 0 deg paste-2539.97 mask+0: 3(-4.325,-0.335) 4(4.325,-0.335)
  round 0.65 hole 0.4 paste-2539.97 mask+0: A1(-2.975,4.025) A4(-2.125,4.025) A5(-1.275,4.025) A6(-0.425,4.025) A7(0.425,4.025) A8(1.275,4.025) A9(2.125,4.025) A12(2.975,4.025) B1(2.975,2.675) B4(2.125,2.675) B5(1.275,2.675) B6(0.425,2.675) B7(-0.425,2.675) B8(-1.275,2.675) B9(-2.125,2.675) B12(-2.975,2.675)
  silkscreen extent -4.57,0.89 4.57,5.37, body extent -4.87,-4.83 4.87,4.83, height 0.25
ONSC-SOD-123-2-425-04_V [mm] "SOD, 2-Leads, Body 2.69x1.6mm"
  rect 0.91x1.22 smd: 1(-1.635,0) 2(1.635,0)
  silkscreen extent -1.76,-0.8 0.78,1.28, body extent -1.35,-0.8 1.35,0.8, height 1.35
ONSC-SOD-323-2-477-02_V [mm] "SOD, 2-Leads, Body 1.7x1.25mm"
  rect 0.63x0.83 smd: 1(-1.115,0) 2(1.115,0)
  silkscreen extent -1.24,-0.67 0.4,1.09, body extent -0.85,-0.63 0.85,0.63, height 1.06
ONSC-SOD-523-2-502-01_V [mm] "SOD, 2-Leads, Body 1.2x0.8mm"
  rect 0.48x0.4 smd: 1(-0.66,0) 2(0.66,0)
  silkscreen extent -0.75,-0.4 0.07,0.65, body extent -0.6,-0.4 0.6,0.4, height 0.7
ONSC-SOT-23-3-318-08_V [mm] "SOT23, 3-Leads, Body 2.92x1.3mm, Pitch 0.95mm"
  rect 0.9x0.8 smd: 1(-1,0.95) 2(-1,-0.95) 3(1,0)
  silkscreen extent -1.12,-1.46 0.65,2.02, body extent -0.65,-1.46 0.65,1.46, height 1.11
RESC0603(1608)_N [mm] "Chip Resistor, Body 1.6x0.8mm, IPC Medium Density"
  rect 0.9x1 smd: 1(-0.8,0) 2(0.8,0)
  silkscreen extent -0.05,-0.4 0.05,0.4, body extent -0.85,-0.47 0.85,0.47, height 0.6
RESC1005X40X25LL05T10 [mm] "Chip Resistor, 2-Leads, Body 1.00x0.50mm, IPC High Density"
  rect 0.5x0.45 smd: 1(-0.375,0) 2(0.375,0)
  body extent -0.53,-0.27 0.53,0.28, height 0.4
RESC1005X40X25NL05T05 [mm] "Chip Resistor, 2-Leads, Body 1.05x0.55mm, IPC Medium Density"
  rect 0.55x0.55 smd: 1(-0.45,0) 2(0.45,0)
  body extent -0.53,-0.28 0.53,0.28, height 0.4
RESC1005X40X25NL05T10 [mm] "Chip Resistor, 2-Leads, Body 1.00x0.50mm, IPC Medium Density"
  rect 0.6x0.55 smd: 1(-0.425,0) 2(0.425,0)
  body extent -0.53,-0.27 0.53,0.28, height 0.4
RESC1608X55X25LL10T15 [mm] "Chip Resistor, 2-Leads, Body 1.60x0.80mm, IPC High Density"
  rect 0.6x0.8 smd: 1(-0.65,0) 2(0.65,0)
  body extent -0.85,-0.45 0.85,0.45, height 0.55
RESC1608X55X25ML10T15 [mm] "Chip Resistor, 2-Leads, Body 1.60x0.80mm, IPC Low Density"
  rect 0.8x1 smd: 1(-0.75,0) 2(0.75,0)
  body extent -0.85,-0.45 0.85,0.45, height 0.55
SOIC127P600X175-8N [mm]
  rect 1.5x0.7 smd: 1(-2.7,1.905) 2(-2.7,0.635) 3(-2.7,-0.635) 4(-2.7,-1.905) 5(2.7,-1.905) 6(2.7,-0.635) 7(2.7,0.635) 8(2.7,1.905)
  silkscreen extent -3.45,-2.45 1.6,2.61, body extent -3,-2.45 3,2.45, height 1.75
SOP65P210X110-6N [mm]
  rect 0.95x0.45 smd: 1(-1.1,0.65) 2(-1.1,0) 3(-1.1,-0.65) 4(1.1,-0.65) 5(1.1,0) 6(1.1,0.65)
  silkscreen extent -1.58,-1 0.28,1.22, body extent -1.05,-1 1.05,1, height 1
SOP80P1176X120-54N [mm]
  rect 1.295x0.6 smd: 1(-5.728,10.4) 2(-5.728,9.6) 3(-5.728,8.8) 4(-5.728,8) 5(-5.728,7.2) 6(-5.728,6.4) 7(-5.728,5.6) 8(-5.728,4.8) 9(-5.728,4) 10(-5.728,3.2) 11(-5.728,2.4) 12(-5.728,1.6) 13(-5.728,0.8) 14(-5.728,0) 15(-5.728,-0.8) 16(-5.728,-1.6) 17(-5.728,-2.4) 18(-5.728,-3.2) 19(-5.728,-4) 20(-5.728,-4.8) 21(-5.728,-5.6) 22(-5.728,-6.4) 23(-5.728,-7.2) 24(-5.728,-8) 25(-5.728,-8.8) 26(-5.728,-9.6) 27(-5.728,-10.4) 28(5.728,-10.4) 29(5.728,-9.6) 30(5.728,-8.8) 31(5.728,-8) 32(5.728,-7.2) 33(5.728,-6.4) 34(5.728,-5.6) 35(5.728,-4.8) 36(5.728,-4) 37(5.728,-3.2) 38(5.728,-2.4) 39(5.728,-1.6) 40(5.728,-0.8) 41(5.728,0) 42(5.728,0.8) 43(5.728,1.6) 44(5.728,2.4) 45(5.728,3.2) 46(5.728,4) 47(5.728,4.8) 48(5.728,5.6) 49(5.728,6.4) 50(5.728,7.2) 51(5.728,8) 52(5.728,8.8) 53(5.728,9.6) 54(5.728,10.4)
  silkscreen extent -6.38,-11.11 4.73,11.11, body extent -5.88,-11.11 5.88,11.11, height 1.2
"SW4_PTS815 SJM 250 SMTR LFS_CNK" [mil]
  rect 39x28 smd paste+0 mask+0: 1(-88.58,42.32) 2(88.58,42.32) 3(-88.58,-42.32) 4(88.58,-42.32)
  silkscreen extent -176,-72 92,72
WL-SMCW_0603_150060xx75000 [mm] "SMD Mono-color Chip LED, body 1.60 x 0.80 mm"
  rect 0.8x0.8 smd: 1(-0.8,0) 2(0.8,0)
  silkscreen extent -1.55,-0.4 -1.4,0.4, body extent -0.8,-0.4 0.8,0.4, height 0.7

## Part data
B1: library part CMP-007-000000-1, "DRAM 256M, 3.3V, SDRAM 16Mx16 143MHz", MANUFACTURER_NAME="Integrated Silicon Solution Inc.", Mouser Part Number=870-IS42S16160J-7TLI, Datasheet Link=http://www.issi.com/WW/pdf/42-45S83200J-16160J.pdf, Design Item ID=IS42S16160J-7TLI, Geometry.Height=1.2mm, MANUFACTURER_PART_NUMBER=IS42S16160J-7TLI, Mouser Price/Stock=https://www.mouser.co.uk/ProductDetail/ISSI/IS42S16160J-7TLI?qs=uCnMRCNammmen%252BmWnq1g5A%3D%3D, Source=IS42S16160J-7TLI.SchLib
C7 C8 C9 C10: library part CMP-06035-011672-1, "Multi-Layer Ceramic Capacitor 22uF 25V X5R ±20% 0805 Emboss T/R", Capacitance=22uF, Case Code (Imperial)=0805, Case Code (Metric)=2012, Max Operating Temperature=85°C, Min Operating Temperature=-55°C, Ratings=AEC-Q200, Tolerance=20%, Voltage Rating=25V, Case/Package=0805, Length=0.079inch, Mount="Surface Mount", Packaging="Tape and Reel", Thickness=0.057inch, Width=0.049inch
C11 C12 C19 C20 C24 C25 C28 C34: library part CMP-2006-02241-1, Manufacturer=Kemet, Part Number=C0603C105K9PACTU
C13 C18 C21 C26 C35: library part CMP-2100-03601-2, "CAP CER 0.1UF 50V X7R 0603", Capacitance="100 nF", Manufacturer=YAGEO, Package=CC0603-DA, Temperature="-55°C to +125°C", Temperature Characteristic=X7R, Temperature Coefficient=15%, Temperature Range High=+125°C, Temperature Range Low=-55°C, Tolerance=0.1, Voltage="50 V", Automotive=No, Category=Cap, ComponentLink2Description=Datasheet, ComponentLink2URL=http://www.yageo.com/documents/recent/UPY-GPHC_X7R_6.3V-to-50V_18.pdf, Device Class L1="Passive Components", Device Class L2=Capacitors, Device Class L3="Ceramic Capacitors", Digikey Description="CAP CER 0.1UF 50V X7R 0603", Footprint Url=http://www.yageo.com/exep/pages/download/literatures/UPY-C_GEN_24.pdf, Height=0.9mm, Lead Free=Yes, Manufacturer Part Number=CC0603KRX7R9BB104, Material=Ceramic, Mouser Description="Multilayer Ceramic Capacitor, CC Series, 0.1 - F, - 10%, X7R, 50 V, 0603 [1608 Metric]", Octopart=https://octopart.com/cc0603krx7r9bb104-yageo-42244635, RoHS=TRUE, Voltage Rating="50 V"
C14 C17 C22: library part CMP-2007-01090-1, Manufacturer=Kemet, Part Number=C0805S472K5RACTU
C15: library part CMP-03422-000612-1, "CAP CER 1UF 25V X5R 0603", Capacitance="1 uF", Manufacturer=YAGEO, Package=CC0603-DA, Temperature="-55°C to +125°C", Temperature Characteristic=X5R, Temperature Coefficient=15%, Temperature Range High=+125°C, Temperature Range Low=-55°C, Tolerance=0.1, Voltage="25 V", Automotive=No, Category=Cap, ComponentLink2Description=Datasheet, ComponentLink2URL=http://www.yageo.com/documents/recent/UPY-GPHC_X7R_6.3V-to-50V_18.pdf, Device Class L1="Passive Components", Device Class L2=Capacitors, Device Class L3="Ceramic Capacitors", Digikey Description="CAP CER 1UF 25V X5R 0603", Footprint Url=http://www.yageo.com/exep/pages/download/literatures/UPY-C_GEN_24.pdf, Height=0.9mm, Lead Free=Yes, Manufacturer Part Number=CC0603KRX5R8BB105, Material=Ceramic, Mouser Description="Multilayer Ceramic Capacitors MLCC - SMD/SMT 1.0uF 25V X5R 10%", Octopart=https://octopart.com/cc0603krx5r8bb105-yageo-9292811, RoHS=TRUE, Voltage Rating="25 V"
C16: library part CMP-2000-06091-2, "Cap Ceramic 1nF 50V X7R ±10% Pad SMD 0603 +125°C T/R", Capacitance=1nF, Case Code (Imperial)=0603, Case Code (Metric)=1608, Dielectric=X7R, Max Operating Temperature=125°C, Min Operating Temperature=-55°C, Package Quantity=1, Tolerance=10%, Voltage=50V, Case/Package=0603, Contact Plating=Tin, Depth=0.8mm, Height=0.8mm, Lead Free="Lead Free", Length=1.6mm, Material=Ceramic, Mount="Surface Mount", Packaging="Tape and Reel", Radiation Hardening=No, Thickness=0.035inch, Voltage Rating=50V, Voltage Rating (DC)=50V, Width=0.031inch
C23 C29: library part CMP-03422-000048-1, "CAP CER 0.1UF 16V X7R 0402", Capacitance="100 nF", Manufacturer=YAGEO, Package=CC0402, Temperature="-55°C to +125°C", Temperature Characteristic=X7R, Temperature Coefficient=30ppm/°C, Temperature Range High=+125°C, Temperature Range Low=-55°C, Tolerance=0.1, Voltage Rating="16 V", Automotive=No, Automotive Grade=NA, Category=Cap, ComponentLink2Description=Datasheet, ComponentLink2URL=http://www.yageo.com/documents/recent/UPY-GP_NP0_16V-to-50V_16.pdf, Device Class L1="Passive Components", Device Class L2=Capacitors, Device Class L3="Ceramic Capacitors", Digikey Description="CAP CER 0.1UF 16V X7R 0402", Footprint Url=http://www.yageo.com/exep/pages/download/literatures/UPY-C_GEN_24.pdf, Height=0.55mm, Ipc Land Pattern Name=CAPC10050X50, Lead Free=Yes, Manufacturer Part Number=CC0402KRX7R7BB104, Material=Ceramic, Mouser Description="0402 0.1 uF 16 V ±10 % Tolerance X7R SMT Multilayer Ceramic Capacitor", Octopart=https://octopart.com/cc0402krx7r7bb104-yageo-42244624, RoHS=TRUE
C27: library part CMP-13271-002624-1, "CL21 Series 0805 4.7uF 25V ±10% Tolerance X5R Multilayer Ceramic Chip Capacitor", Capacitance=4.7uF, Case Code (Imperial)=0805, Case Code (Metric)=2012, Dielectric=X5R, Max Operating Temperature=85°C, Min Operating Temperature=-55°C, Package Quantity=1, Tolerance=10%, Voltage Rating=25V, Case/Package=0805, Depth=1.25mm, Height=1.25mm, Lead Free="Lead Free", Length=2mm, Mount="Surface Mount", Packaging="Tape and Reel", Radiation Hardening=No, Thickness=0.055inch, Voltage Rating (DC)=25V, Width=0.049inch
C30 C31 C32 C33: library part CMP-2100-03592-2, "CAP CER 10000PF 50V X7R 0402", Capacitance="10 nF", Manufacturer=YAGEO, Package=CC0402, Temperature="-55°C to +125°C", Temperature Characteristic=X7R, Temperature Coefficient=30ppm/°C, Temperature Range High=+125°C, Temperature Range Low=-55°C, Tolerance=0.1, Voltage Rating="50 V", Automotive=No, Automotive Grade=NA, Category=Cap, ComponentLink2Description=Datasheet, ComponentLink2URL=http://www.yageo.com/documents/recent/UPY-GP_NP0_16V-to-50V_16.pdf, Device Class L1="Passive Components", Device Class L2=Capacitors, Device Class L3="Ceramic Capacitors", Digikey Description="CAP CER 10000PF 50V X7R 0402", Footprint Url=http://www.yageo.com/exep/pages/download/literatures/UPY-C_GEN_24.pdf, Height=0.55mm, Ipc Land Pattern Name=CAPC10050X50, Lead Free=Yes, Manufacturer Part Number=CC0402KRX7R9BB103, Material=Ceramic, Mouser Description="0402 10 nF 50 V ±10 % Tolerance X7R SMT Multilayer Ceramic Capacitor", Octopart=https://octopart.com/cc0402krx7r9bb103-yageo-8376513, RoHS=TRUE
CJ_1 CJ_2: library part CMP-1037-04188-1, "CAP 100nF 25V ±5% 1206 (3216 Metric) Thickness 1.7mm SMD", Case-EIA=1206, Case-Metric=3216, Rated Voltage="25 V", Tolerance=Â±5%, Max Thickness="1.7 mm", Technology=SMT
D1: library part CMP-1060-00510-1, "Zener Voltage Regulator, 500 mW, 2-Pin SOD-123, Pb-Free, Tape and Reel", Manufacturer="On Semiconductor", ComponentLink1Description="Manufacturer URL", ComponentLink1URL=http://www.onsemi.com/, ComponentLink2Description=Datasheet, ComponentLink2URL=http://www.onsemi.com/pub_link/Collateral/MMSZ4678T1-D.PDF, ComponentLink3Description="Package Specification", ComponentLink3URL=http://www.onsemi.com/pub_link/Collateral/425-04.PDF, DatasheetVersion="Rev. 9", Mounting Technology="Surface Mount", P Max (W)=0.5, PackageDescription="2-Pin SOD, Body 1.6 x 2.69 mm", PackageReference=SOD-123-2-425-04, PackageVersion="Rev. G, 10/2009", Packing="Tape and Reel", PartNumber=SZMMSZ4678T1G, RoHS=Pb-Free, VZ Typ (V)=1.8